# Altium PCB DAC_PCB.PcbDoc (part 1 of 2)
Units mil, origin at the board's own origin, x right, y up, seen from the top; angles counter-clockwise.
Board outline 5600 x 4000 mil, 4 copper layers (Top Layer, Plane(Gnd), Plane(Power), Bottom Layer), stack 23.756 mil thick; 217 components, 206 nets, 575 pads, 152 vias.
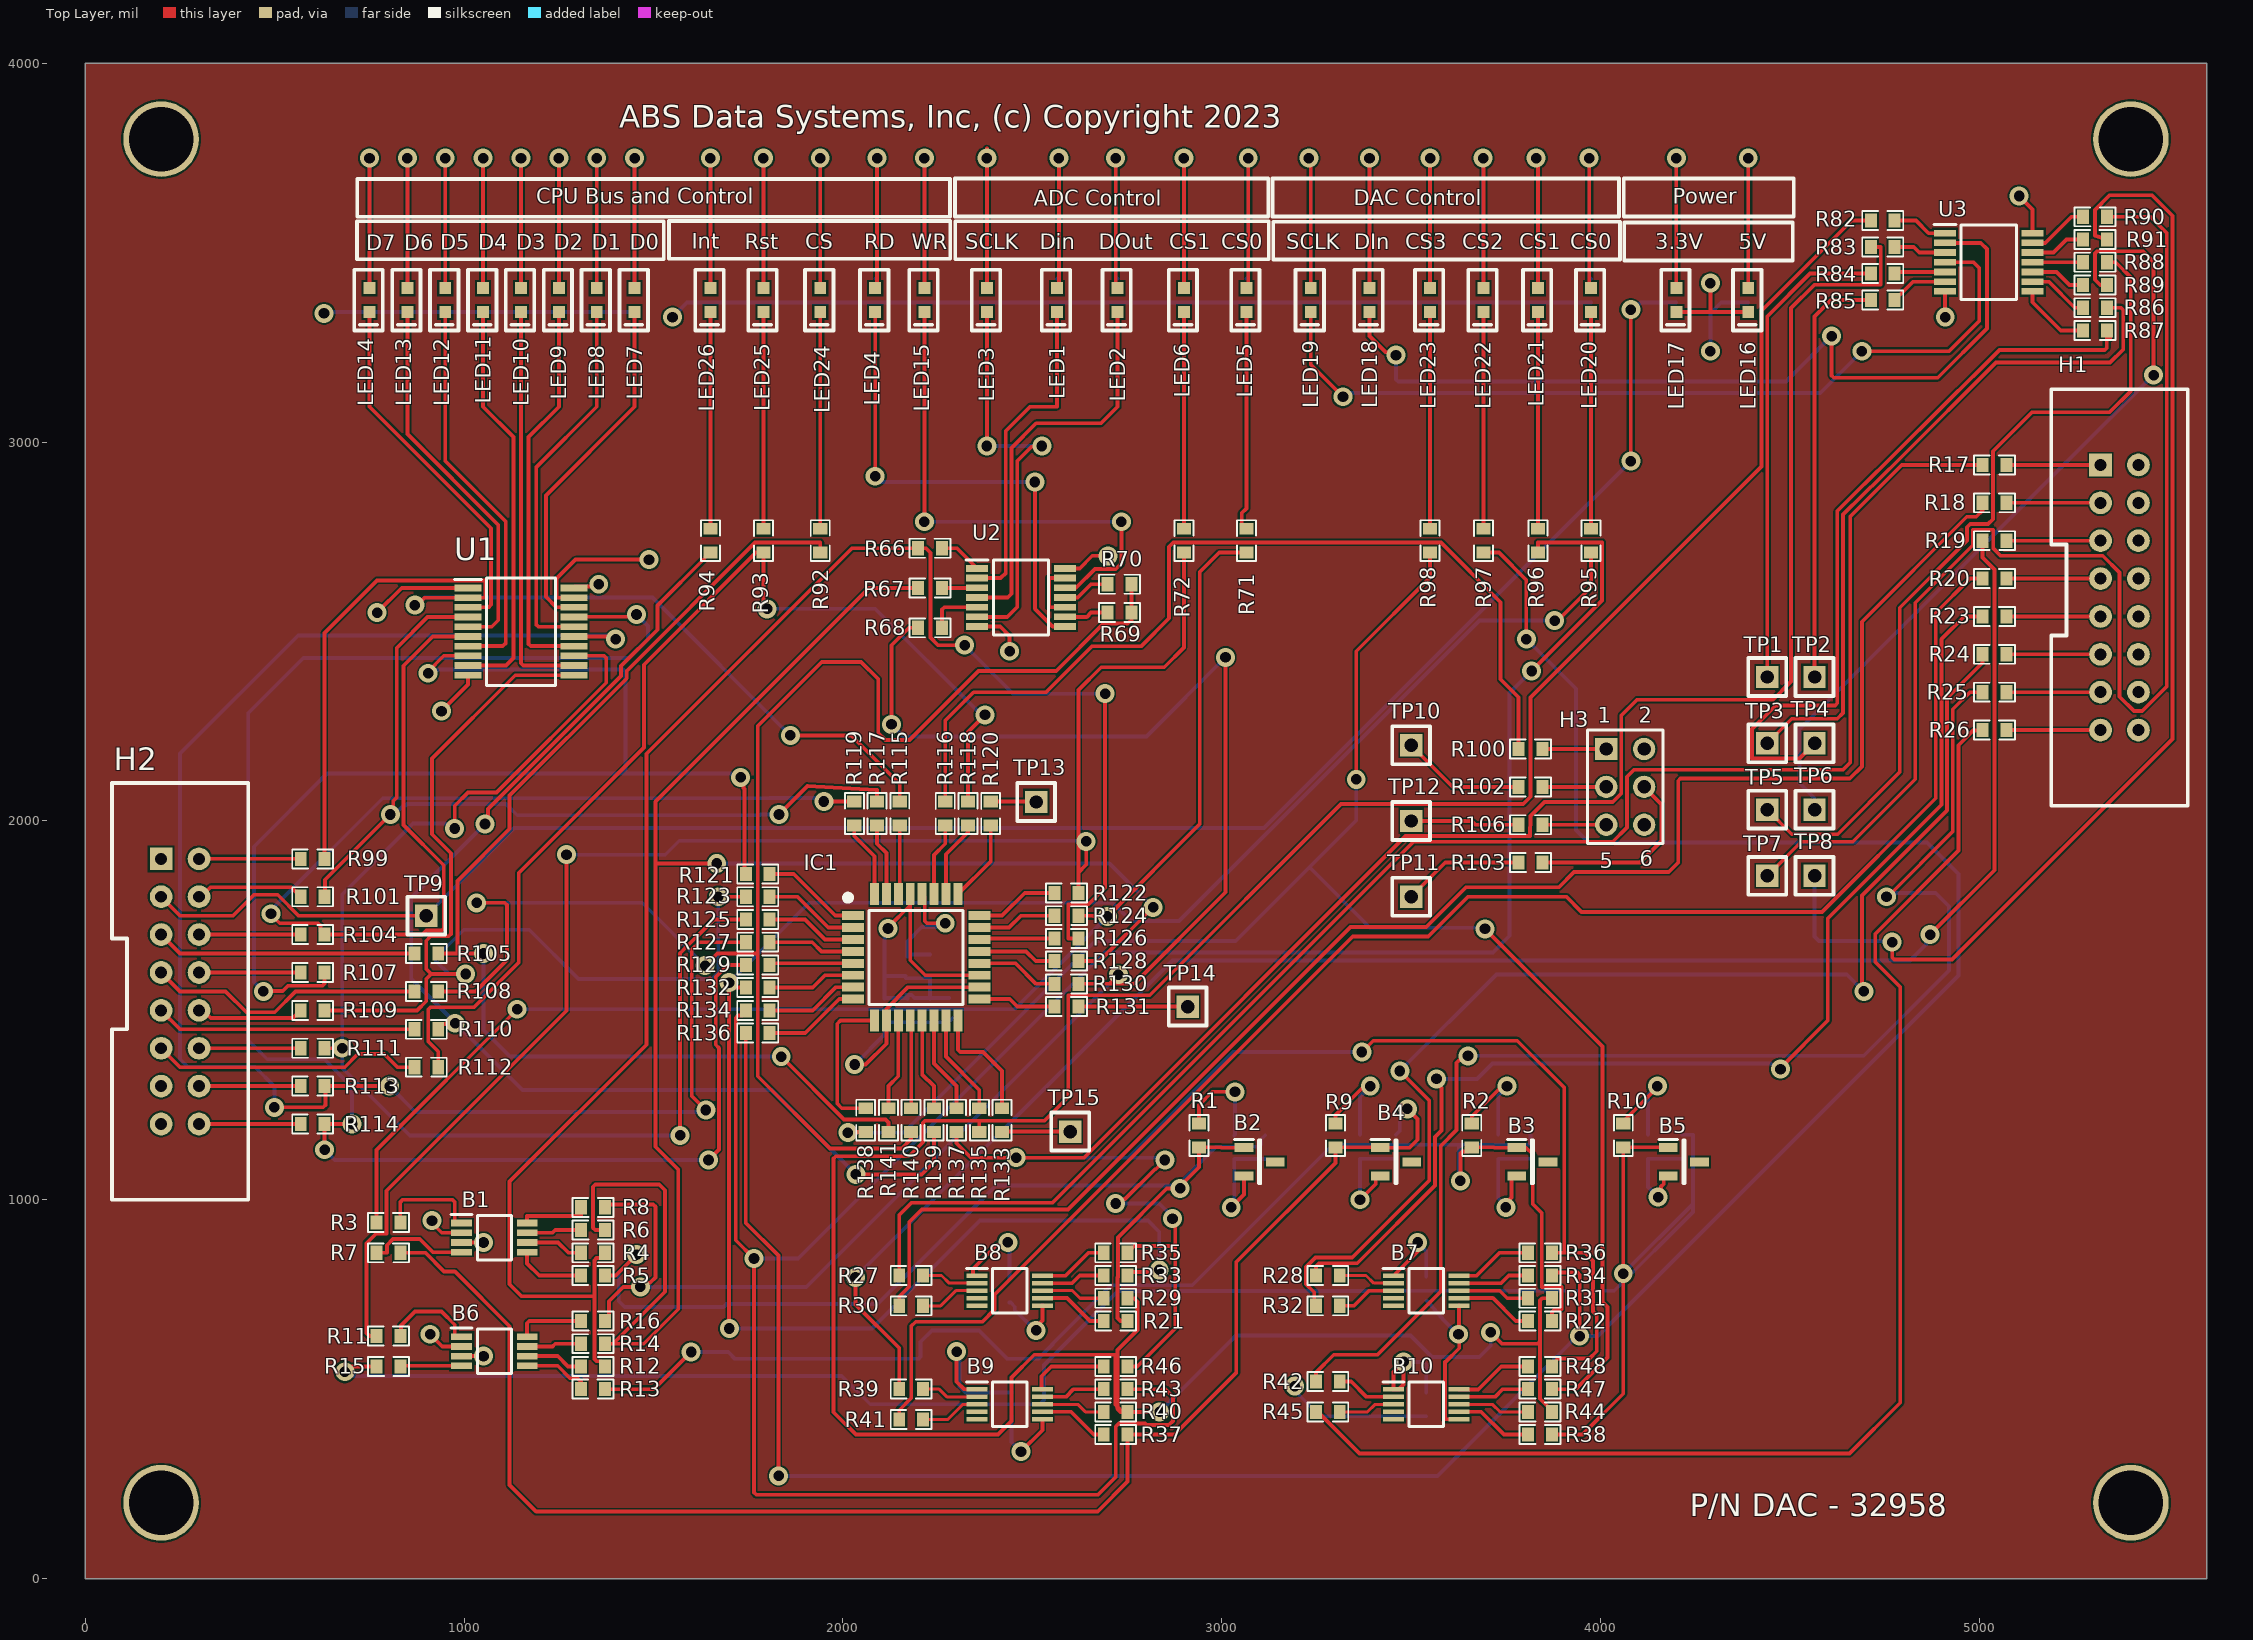
[diagram p0: Top Layer view]
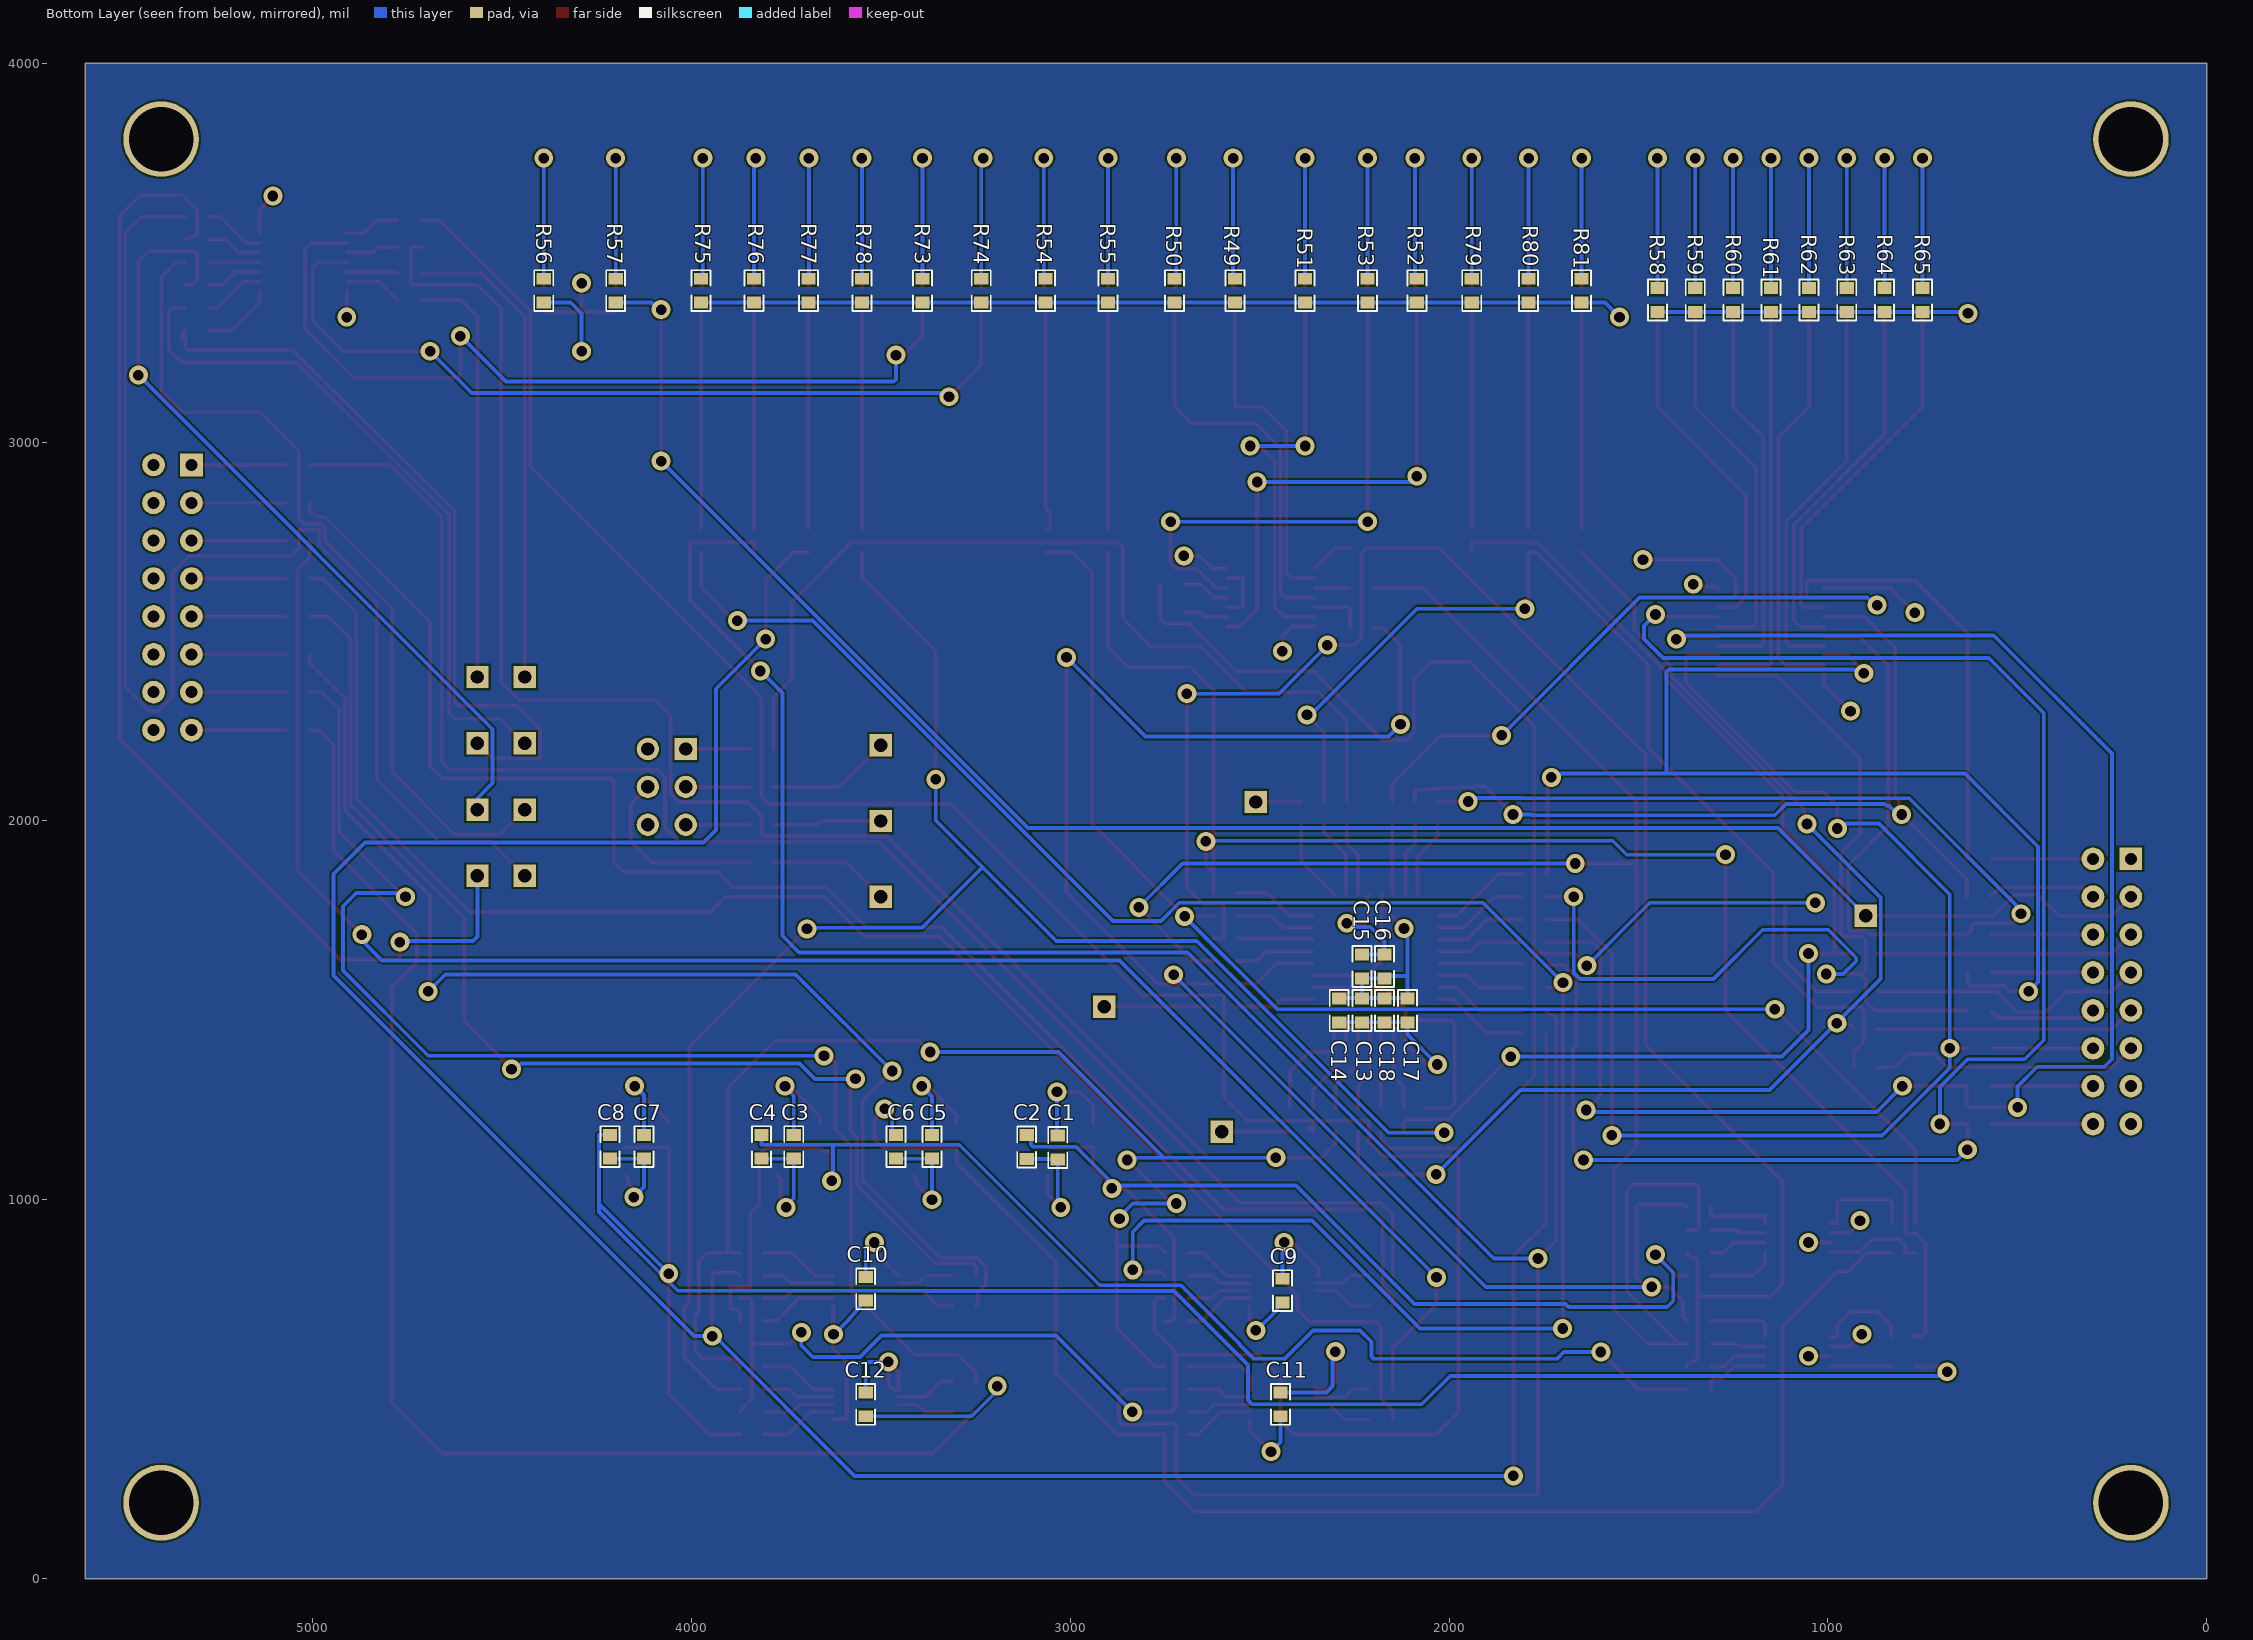
[diagram p1: Bottom Layer view, seen from below]
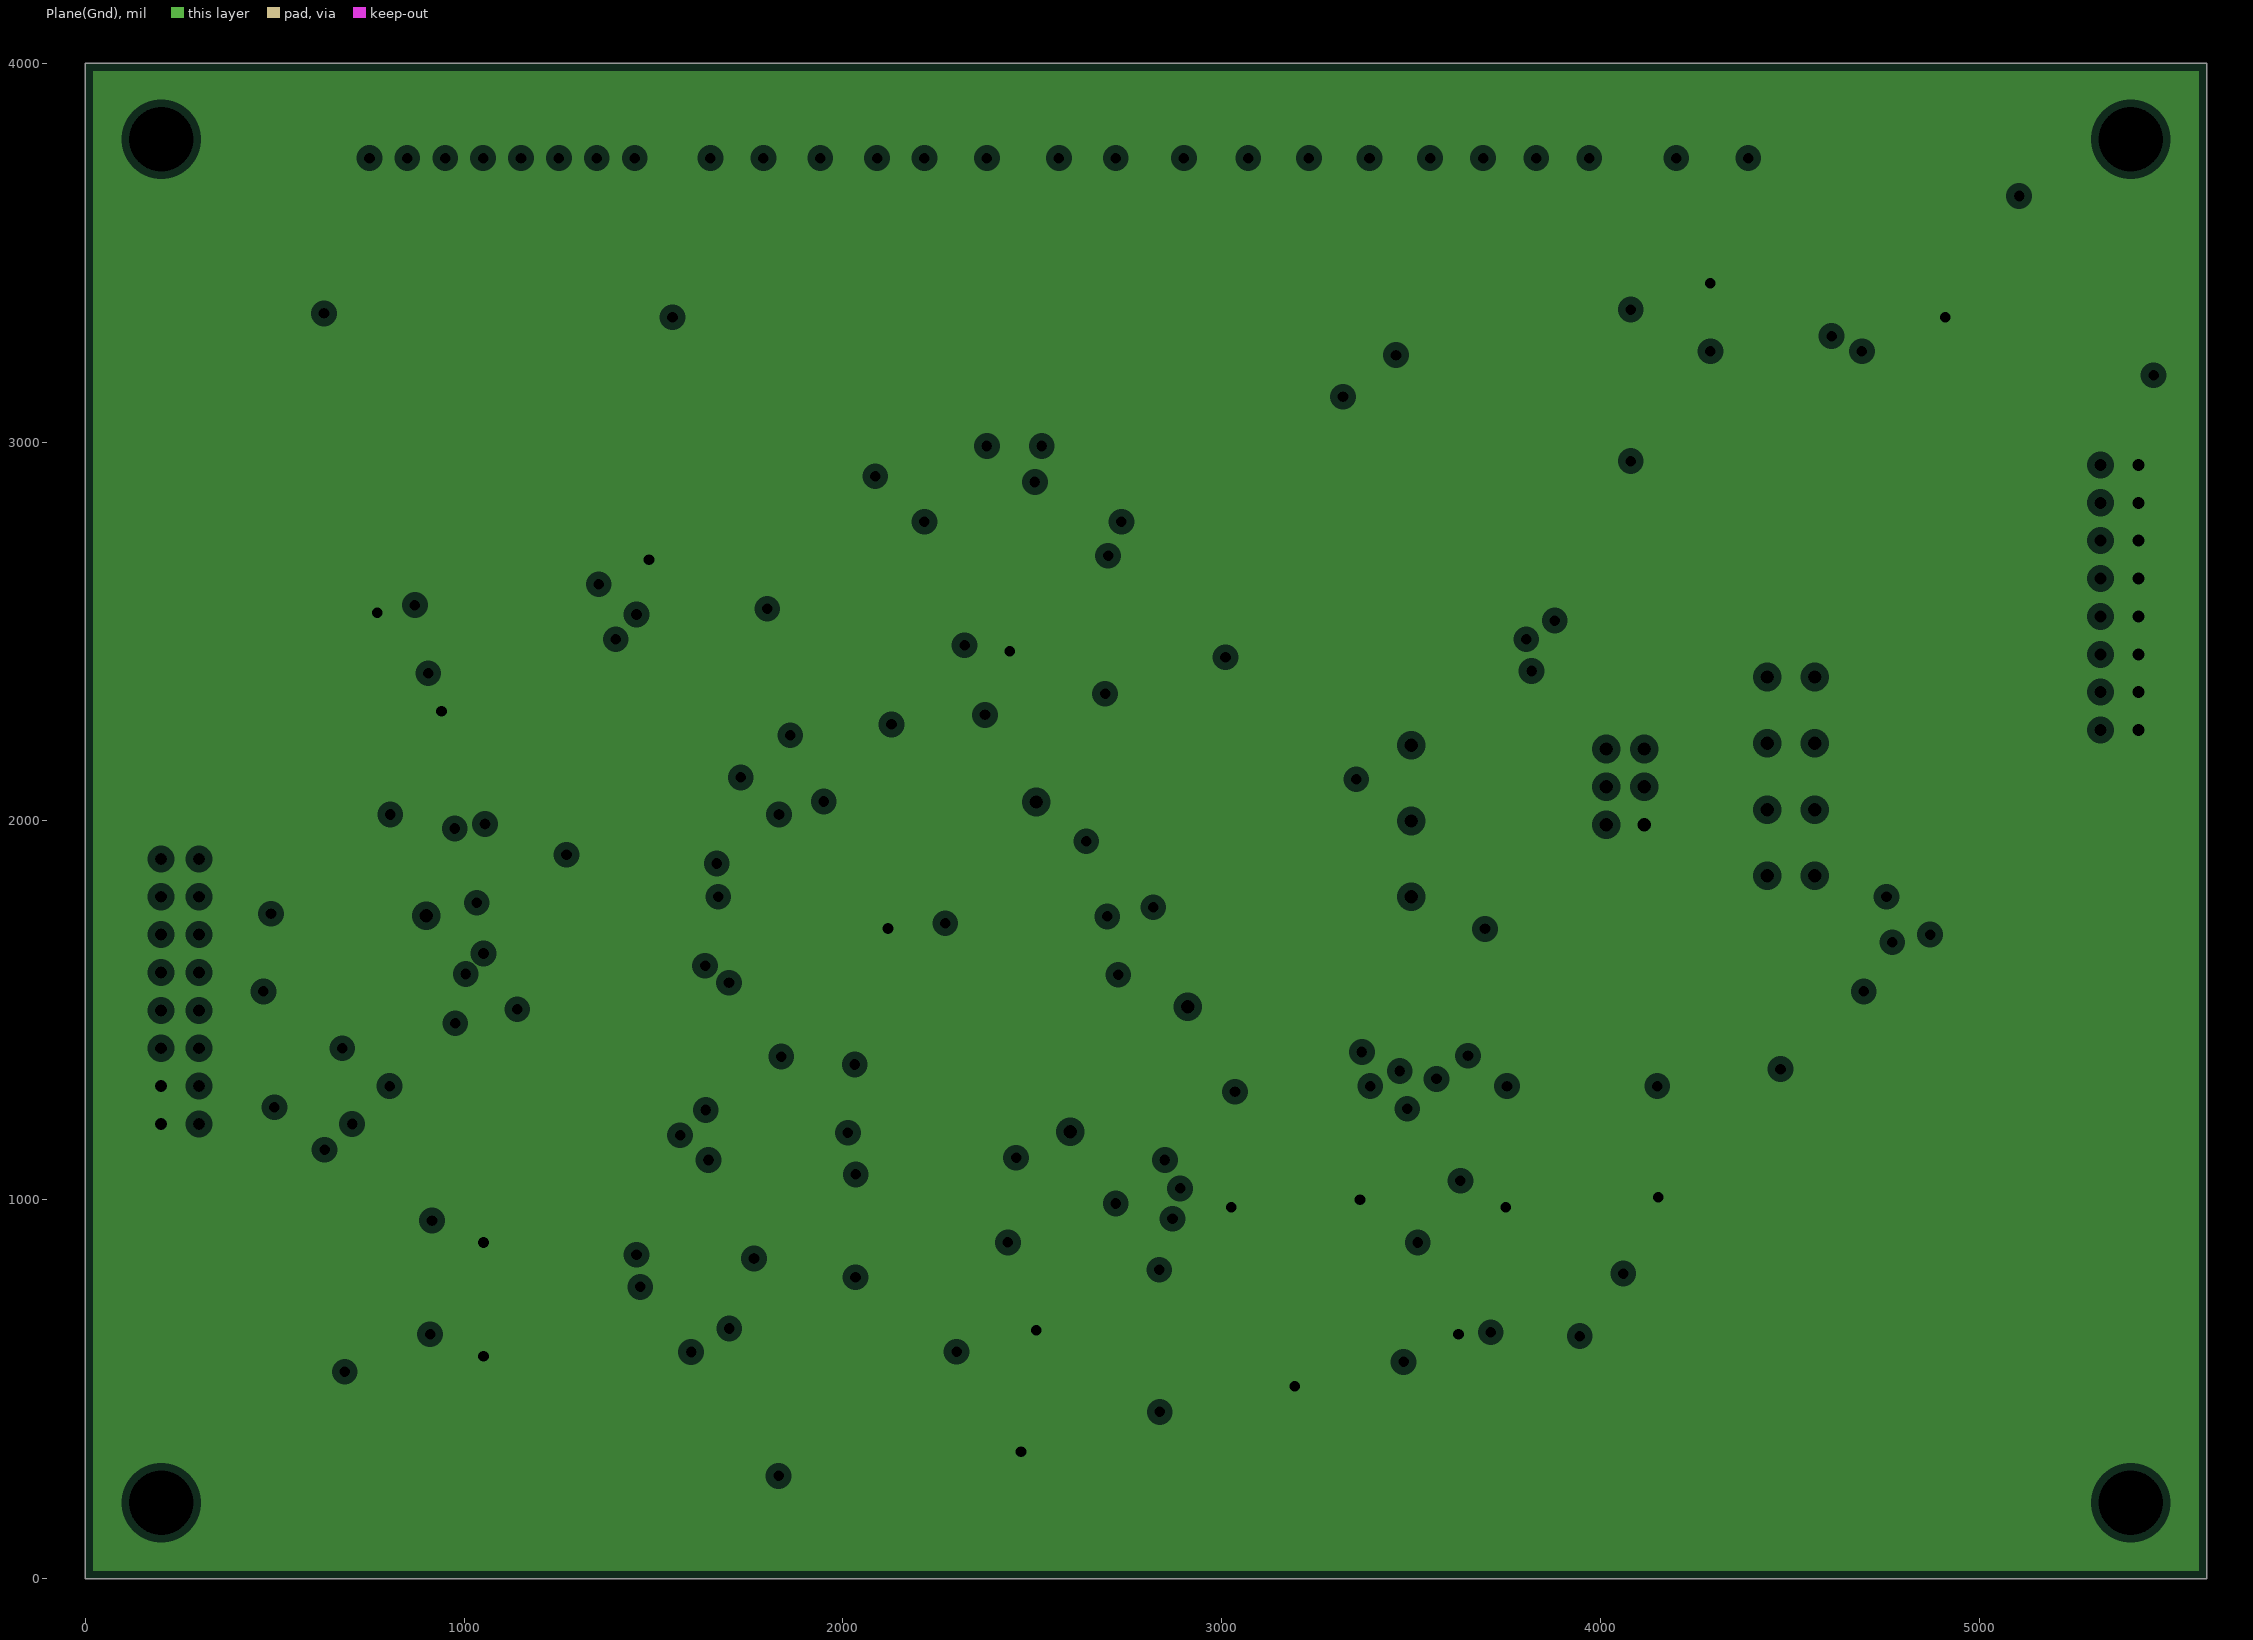
[diagram p2: Plane(Gnd), clearances drawn from the general rule]
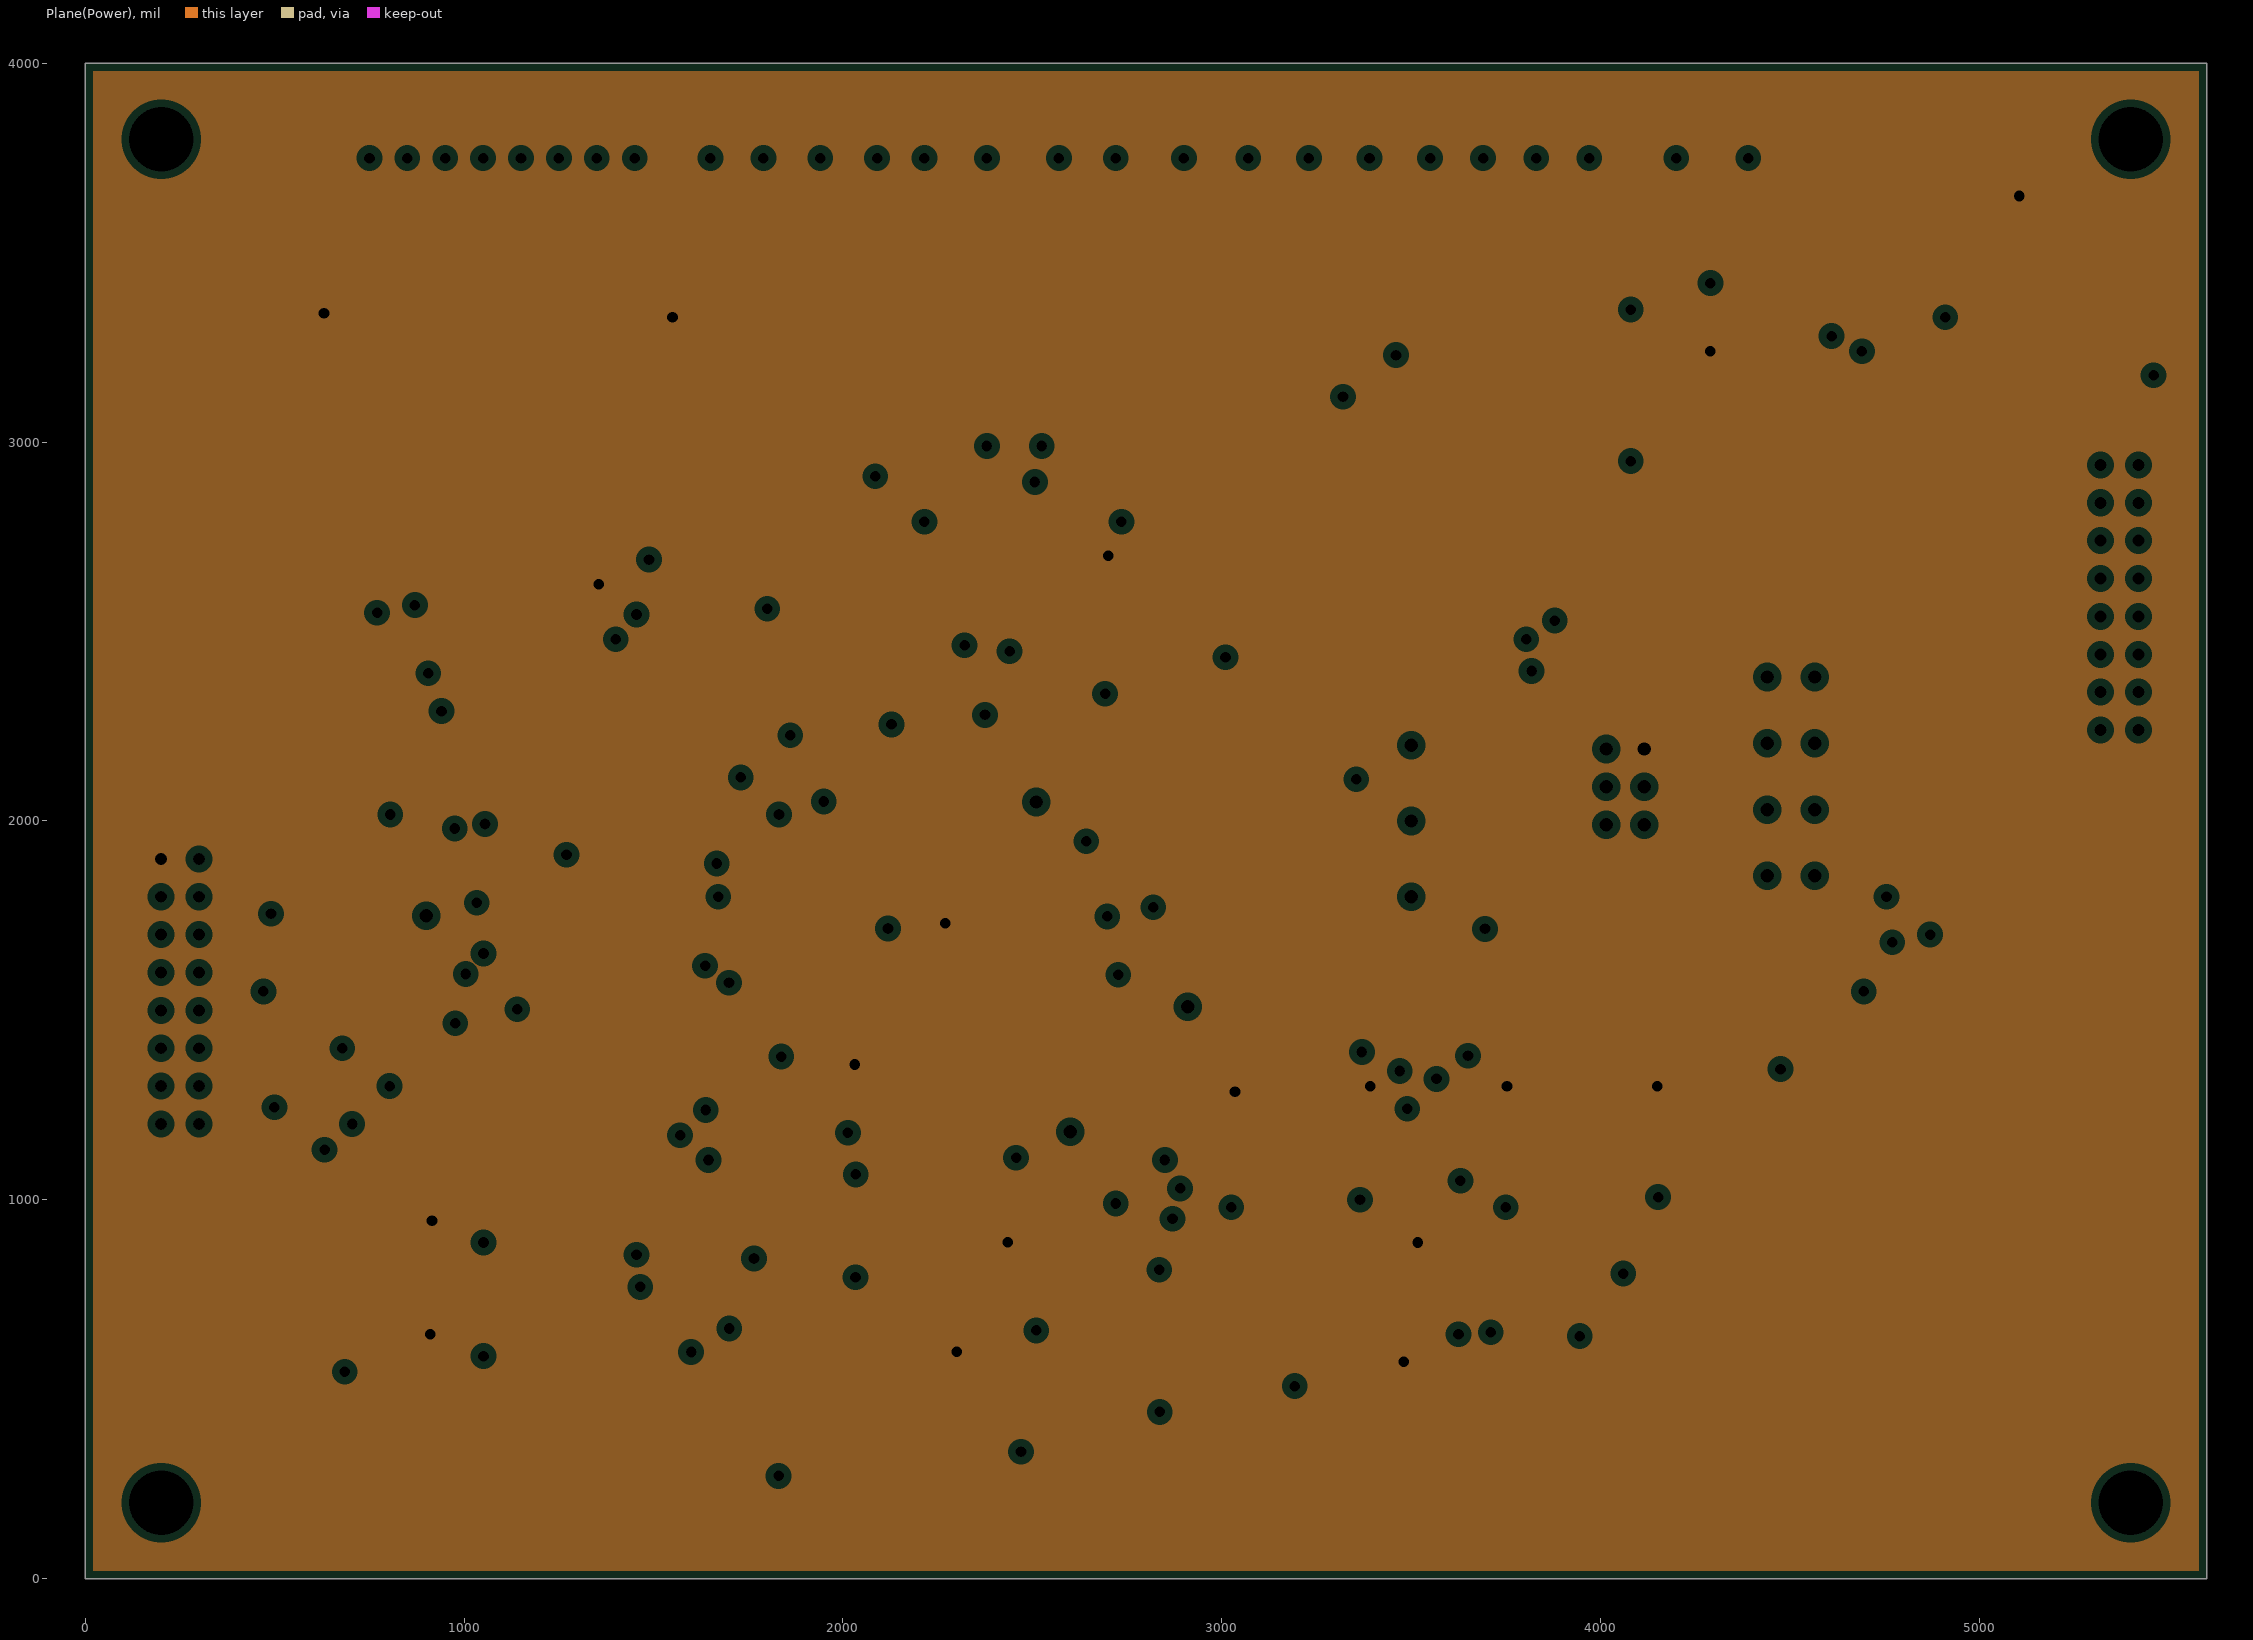
[diagram p3: Plane(Power), clearances drawn from the general rule]
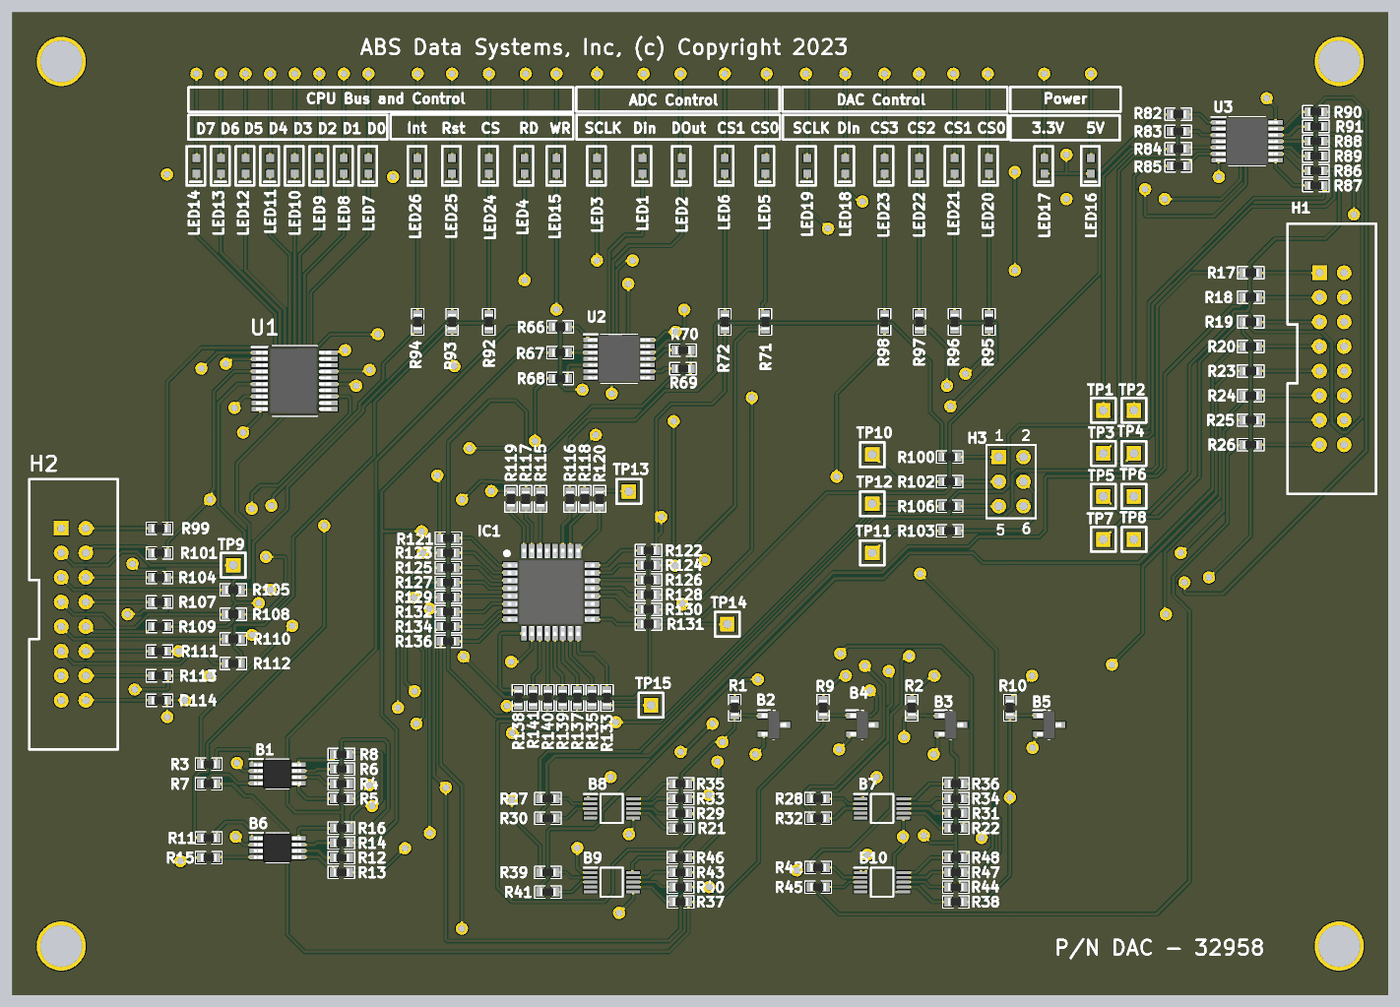
[diagram p5: 3D render of the assembled board from above, using the file's embedded part models]
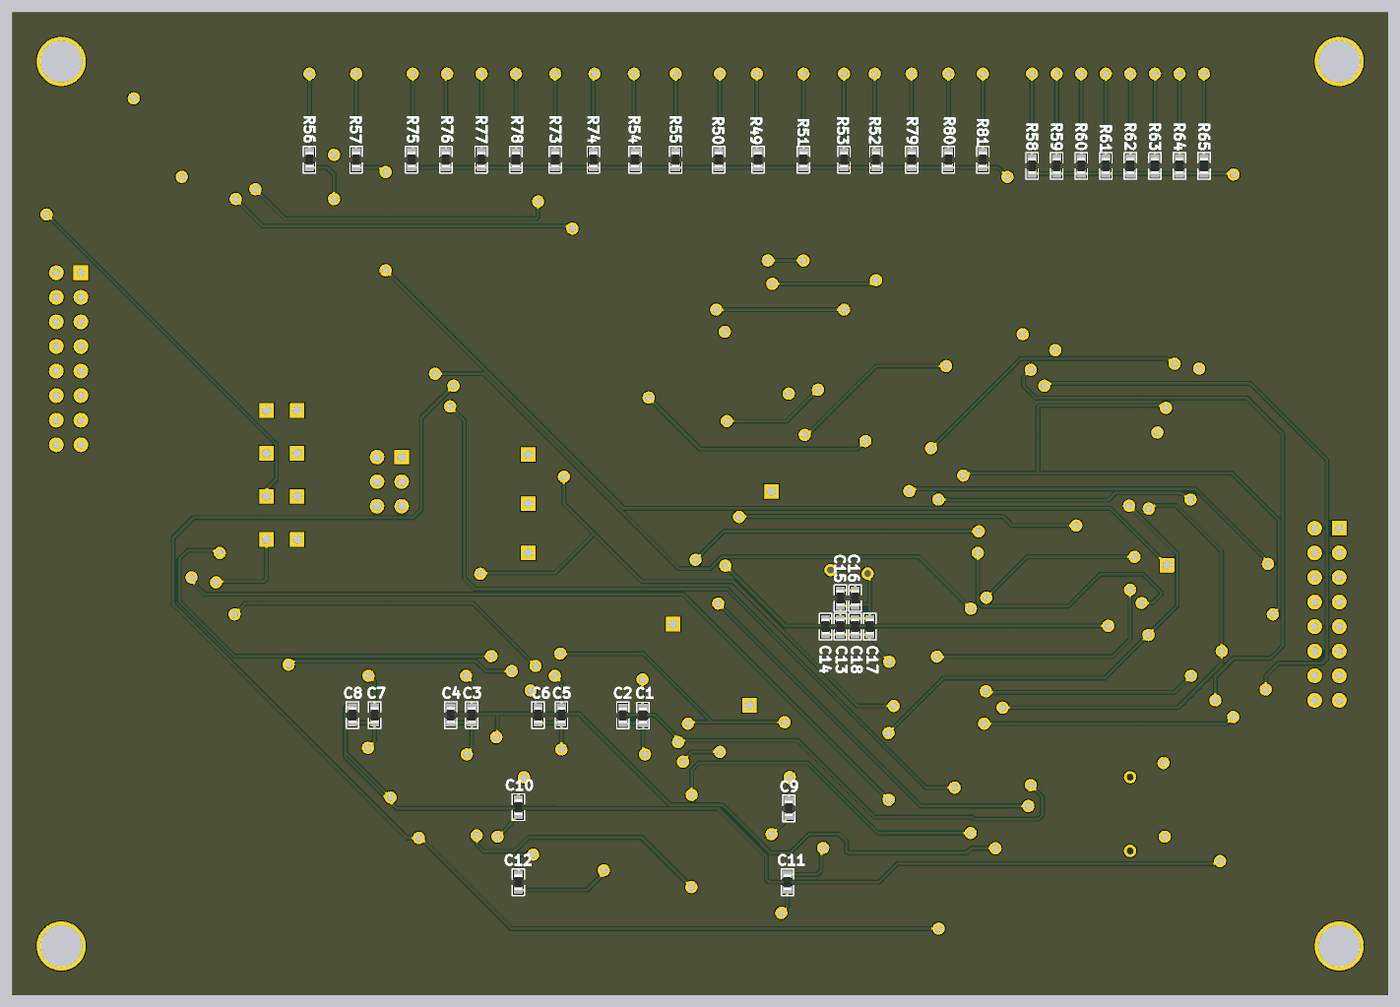
[diagram p6: 3D render of the assembled board from below, using the file's embedded part models]

## Layer stack, top to bottom
Top Solder: solder mask 0.4, Solder Resist, Dk 3.5
Top Layer: signal copper 1.4
Dielectric 2: prepreg 2.8, PP-006, Dk 4.1
Plane(Gnd): plane copper 1.378, net GND
Dielectric 1: dielectric 12.6, FR-4, Dk 4.8
Plane(Power): plane copper 1.378, net +5
Dielectric 3: prepreg 2.8, PP-006, Dk 4.1
Bottom Layer: signal copper 1.4
Bottom Solder: solder mask 0.4, Solder Resist, Dk 3.5

## Board outline
0,0 0,4000 5600,4000 5600,0

## Design rules (kind name [scope] priority, off if disabled: settings)
Clearance [All] p1: gap=5 ignorepadtopadclearanceinfootprint=FALSE
HoleSize [All] p1: absolutevalues=TRUE maxlimit=200 minlimit=1 maxpercent=80.000 minpercent=20.000
HoleToHoleClearance [All] p1: gap=5 allowstackedmicrovias=TRUE
MinimumSolderMaskSliver [All] p1: minsoldermaskwidth=5
PlaneClearance [All] p1: clearance=20
PlaneConnect [All] p1: planeconnectstyle=Relief reliefexpansion=20 reliefentries=4 reliefconductorwidth=10 reliefairgap=10
PolygonConnect [All] p1: connectstyle=Relief reliefconductorwidth=10 reliefentries=4 polygonreliefangle="90 Angle" airgapwidth=10
RoutingVias [All] p1: holewidth=28 width=50 viastyle="Through Hole" minholewidth=28 minwidth=50 maxholewidth=28 maxwidth=50
SilkToSilkClearance [All] p1: silktosilkclearance=4
SilkToSolderMaskClearance [IsPad] p1: minsilkscreentomaskgap=3.5 clearancetoexposedcopper=TRUE
SolderMaskExpansion [All] p1: expansion=4 istentingtop=FALSE
Width [All] p1: maxlimit=10 minlimit=5 preferedwidth=10 minimp=50.000000 maximp=50.000000 favimp=50.000000
23 further rules are at their usual default settings.

## Classes and differential pairs
component class DAC_LED_Monitor: LED1 LED2 LED3 LED4 LED5 LED6 LED7 LED8 LED9 LED10 LED11 LED12 LED13 LED14 LED15 LED16 LED17 LED18 LED19 LED20 LED21 LED22 LED23 LED24 LED25 LED26 R51 R52 R53 R56 R57 R58 R59 R60 R61 R62 R63 R64 R65 R66 R67 R68 R69 R70 R71 R72 R73 R75 R76 R77 R78 R79 R80 R81 R82 R83 R84 R85 R86 R87 R88 R89 R90 R91 R92 R93 R94 R95 R96 R97 R98 TP1 TP2 TP3 TP4 TP5 TP6 TP7 TP8 U1 U2 U3
component class DAC_IO: B1 B2 B3 B4 B5 B6 B7 B8 B9 B10 C1 C2 C3 C4 C5 C6 C7 C8 C9 C10 C11 C12 H1 R1 R2 R3 R4 R5 R6 R7 R8 R9 R10 R11 R12 R13 R14 R15 R16 R17 R18 R19 R20 R21 R22 R23 R24 R25 R26 R27 R28 R29 R30 R31 R32 R33 R34 R35 R36 R37 R38 R39 R40 R41 R42 R43 R44 R45 R46 R47 R48
component class DAC_CPU: C13 C14 C15 C16 C17 C18 H2 H3 IC1 R99 R100 R101 R102 R103 R104 R105 R106 R107 R108 R109 R110 R111 R112 R113 R114 R115 R116 R117 R118 R119 R120 R121 R122 R123 R124 R125 R126 R127 R128 R129 R130 R131 R132 R133 R134 R135 R136 R137 R138 R139 R140 R141 TP9 TP10 TP11 TP12 TP13 TP14 TP15

## Components (designator, comment, footprint, x,y, rotation, side; value= is the part's Value field where it differs from the comment)
B1 "ADC122S021CIMMX_NOPB" SOP65P490X110-8N 1080,900 r0 top locked
B2 "LM4050CIM3X-4.1_NOPB" SOT95P237X95-3N 3100,1100 r0 top locked
B3 "LM4050CIM3X-4.1_NOPB" SOT95P237X95-3N 3820,1100 r0 top locked
B4 "LM4050CIM3X-4.1_NOPB" SOT95P237X95-3N 3460,1100 r0 top locked
B5 "LM4050CIM3X-4.1_NOPB" SOT95P237X95-3N 4220,1100 r0 top locked
B6 "ADC122S021CIMMX_NOPB" SOP65P490X110-8N 1080,600 r0 top locked
B7 "DAC122S085CIMM_NOPB" SOP50P490X110-10N 3540,760 r0 top locked
B8 "DAC122S085CIMM_NOPB" SOP50P490X110-10N 2440,760 r0 top locked
B9 "DAC122S085CIMM_NOPB" SOP50P490X110-10N 2440,460 r0 top locked
B10 "DAC122S085CIMM_NOPB" SOP50P490X110-10N 3540,460 r0 top locked
C1 "100nf" 0603 3033,1138 r90 bottom locked
C2 "2.2uf" 0603 3115,1139 r90 bottom locked
C3 "100nf" 0603 3730,1140 r90 bottom locked
C4 "2.2uf" 0603 3815,1140 r90 bottom locked
C5 "100nf" 0603 3365,1140 r90 bottom locked
C6 "2.2uf" 0603 3460,1140 r90 bottom locked
C7 "100nf" 0603 4125,1140 r90 bottom locked
C8 "2.2uf" 0603 4215,1140 r90 bottom locked
C9 "100nf" 0603 2440,760 r90 bottom locked
C10 "100nf" 0603 3540,765 r90 bottom locked
C11 "100nf" 0603 2445,460 r90 bottom locked
C12 "100nf" 0603 3540,460 r90 bottom locked
C13 "1uf" 0603 2230,1500 r90 bottom locked
C14 "100nf" 0603 2290,1500 r90 bottom locked
C15 "1uf" 0603 2230,1616 r270 bottom locked
C16 "100nf" 0603 2170,1616 r270 bottom locked
C17 "1uf" 0603 2110,1500 r90 bottom locked
C18 "100nf" 0603 2170,1500 r90 bottom locked
H1 "Header_IDC_2x8" HEADER16 5320,2940 r0 top locked
H2 "Header_IDC_2x8" HEADER16 200,1900 r0 top locked
H3 "UDPI Programmer" HDR2X3 4015,2190 r270 top locked
IC1 "AVR64DD32-I_PT" QFP80P900X900X120-32N 2193.32,1640 r0 top locked
LED1 "green" 0603_Diode 2565,3375 r90 top
LED2 "green" 0603_Diode 2725,3375 r90 top
LED3 "green" 0603_Diode 2380,3375 r90 top
LED4 "green" 0603_Diode 2085,3375 r90 top
LED5 "green" 0603_Diode 3065,3375 r90 top
LED6 "green" 0603_Diode 2900,3375 r90 top
LED7 "green" 0603_Diode 1450,3375 r90 top
LED8 "green" 0603_Diode 1350,3375 r90 top
LED9 "green" 0603_Diode 1250,3375 r90 top
LED10 "green" 0603_Diode 1150,3375 r90 top
LED11 "green" 0603_Diode 1050,3375 r90 top
LED12 "green" 0603_Diode 950,3375 r90 top
LED13 "green" 0603_Diode 850,3375 r90 top
LED14 "green" 0603_Diode 750,3375 r90 top
LED15 "red" 0603_Diode 2215,3375 r90 top
LED16 "red" 0603_Diode 4390,3375 r90 top
LED17 "amber" 0603_Diode 4200,3375 r90 top
LED18 "green" 0603_Diode 3390,3375 r90 top
LED19 "green" 0603_Diode 3235,3375 r90 top
LED20 "green" 0603_Diode 3975,3375 r90 top
LED21 "green" 0603_Diode 3835,3375 r90 top
LED22 "green" 0603_Diode 3691,3375 r90 top
LED23 "green" 0603_Diode 3550,3375 r90 top
LED24 "amber" 0603_Diode 1940,3375 r90 top
LED25 "blue" 0603_Diode 1790,3375 r90 top
LED26 "green" 0603_Diode 1650,3375 r90 top
R1 "910" 0603 2940,1170 r270 top
R2 "910" 0603 3660,1170 r270 top locked
R3 "0R" 0603 800,940 r0 top locked
R4 "0R" 0603 1340,860 r180 top locked
R5 "0R" 0603 1340,800 r0 top locked
R6 "0R" 0603 1340,920 r180 top locked
R7 "0R" 0603 800,860 r0 top locked
R8 "0R" 0603 1340,980 r180 top locked
R9 "910" 0603 3300,1170 r270 top locked
R10 "910" 0603 4060,1170 r270 top locked
R11 "0R" 0603 800,640 r0 top locked
R12 "0R" 0603 1340,560 r180 top locked
R13 "0R" 0603 1340,500 r0 top locked
R14 "0R" 0603 1340,620 r180 top locked
R15 "0R" 0603 800,560 r180 top locked
R16 "0R" 0603 1340,680 r180 top locked
R17 "0R" 0603 5040,2940 r0 top locked
R18 "0R" 0603 5040,2840 r0 top locked
R19 "0R" 0603 5040,2740 r0 top locked
R20 "0R" 0603 5040,2640 r0 top locked
R21 "0R" 0603 2720,680 r180 top locked
R22 "0R" 0603 3840,680 r180 top locked
R23 "0R" 0603 5040,2540 r0 top locked
R24 "0R" 0603 5040,2440 r0 top locked
R25 "0R" 0603 5040,2340 r0 top locked
R26 "0R" 0603 5040,2240 r0 top locked
R27 "0R" 0603 2180,800 r180 top locked
R28 "0R" 0603 3280,800 r180 top locked
R29 "0R" 0603 2720,740 r180 top locked
R30 "0R" 0603 2180,720 r180 top locked
R31 "0R" 0603 3840,740 r180 top locked
R32 "0R" 0603 3280,720 r180 top locked
R33 "0R" 0603 2720,800 r180 top locked
R34 "0R" 0603 3840,800 r180 top locked
R35 "0R" 0603 2720,860 r180 top locked
R36 "0R" 0603 3840,860 r180 top locked
R37 "0R" 0603 2720,380 r180 top locked
R38 "0R" 0603 3840,380 r180 top locked
R39 "0R" 0603 2180,500 r180 top locked
R40 "0R" 0603 2720,440 r180 top locked
R41 "0R" 0603 2180,420 r180 top locked
R42 "0R" 0603 3280,520 r180 top locked
R43 "0R" 0603 2720,500 r180 top locked
R44 "0R" 0603 3840,440 r180 top locked
R45 "0R" 0603 3280,440 r180 top locked
R46 "0R" 0603 2720,560 r180 top locked
R47 "0R" 0603 3840,500 r180 top locked
R48 "0R" 0603 3840,560 r180 top locked
R49 "180" 0603 2565,3400 r270 bottom
R50 "180" 0603 2725,3400 r270 bottom
R51 "180" 0603 2380,3400 r270 bottom
R52 "180" 0603 2085,3400 r270 bottom
R53 "180" 0603 2215,3400 r270 bottom
R54 "180" 0603 3065,3400 r270 bottom
R55 "180" 0603 2900,3400 r270 bottom
R56 "180" 0603 4390,3400 r270 bottom
R57 "47" 0603 4200,3400 r90 bottom
R58 "180" 0603 1450,3375 r270 bottom
R59 "180" 0603 1350,3375 r270 bottom
R60 "180" 0603 1250,3375 r270 bottom
R61 "180" 0603 1150,3375 r270 bottom
R62 "180" 0603 1050,3375 r270 bottom
R63 "180" 0603 950,3375 r270 bottom
R64 "180" 0603 850,3375 r270 bottom
R65 "180" 0603 750,3375 r270 bottom
R66 "0R" 0603 2230,2720 r0 top
R67 "0R" 0603 2230,2615 r0 top
R68 "0R" 0603 2230,2510 r0 top
R69 "0R" 0603 2730,2550 r180 top locked
R70 "0R" 0603 2730,2625 r180 top locked
R71 "0R" 0603 3065,2740 r90 top locked
R72 "0R" 0603 2900,2740 r90 top locked
R73 "180" 0603 3390,3400 r270 bottom
R74 "180" 0603 3235,3400 r270 bottom
R75 "180" 0603 3975,3400 r270 bottom
R76 "180" 0603 3835,3400 r270 bottom
R77 "180" 0603 3691,3400 r270 bottom
R78 "180" 0603 3550,3400 r270 bottom
R79 "180" 0603 1940,3400 r270 bottom
R80 "100" 0603 1790,3400 r90 bottom
R81 "180" 0603 1650,3400 r270 bottom
R82 "0R" 0603 4745,3585 r0 top locked
R83 "0R" 0603 4745,3515 r0 top locked
R84 "0R" 0603 4745,3445 r0 top locked
R85 "0R" 0603 4745,3375 r180 top locked
R86 "0R" 0603 5305,3355 r180 top locked
R87 "0R" 0603 5305,3295 r0 top locked
R88 "0R" 0603 5305,3475 r180 top locked
R89 "0R" 0603 5305,3415 r0 top locked
R90 "0R" 0603 5305,3595 r180 top locked
R91 "0R" 0603 5305,3535 r0 top locked
R92 "0R" 0603 1940,2740 r90 top locked
R93 "0R" 0603 1790,2740 r90 top locked
R94 "0R" 0603 1650,2740 r90 top locked
R95 "0R" 0603 3975,2740 r90 top locked
R96 "0R" 0603 3835,2740 r90 top locked
R97 "0R" 0603 3691,2740 r90 top locked
R98 "0R" 0603 3550,2740 r90 top locked
R99 "0R" 0603 600,1900 r180 top locked
R100 "0R" 0603 3815,2190 r0 top
R101 "0R" 0603 600,1800 r180 top locked
R102 "0R" 0603 3815,2090 r0 top
R103 "0R" 0603 3815,1890 r180 top
R104 "0R" 0603 600,1700 r180 top locked
R105 "0R" 0603 900,1650 r0 top locked
R106 "0R" 0603 3815,1990 r0 top
R107 "0R" 0603 600,1600 r180 top locked
R108 "0R" 0603 900,1550 r0 top locked
R109 "0R" 0603 600,1500 r180 top locked
R110 "0R" 0603 900,1450 r0 top locked
R111 "0R" 0603 600,1400 r180 top locked
R112 "0R" 0603 900,1350 r0 top locked
R113 "0R" 0603 600,1300 r180 top locked
R114 "0R" 0603 600,1200 r180 top locked
R115 "0R" 0603 2150,2020 r270 top locked
R116 "0R" 0603 2270,2020 r90 top locked
R117 "0R" 0603 2090,2020 r270 top locked
R118 "0R" 0603 2330,2020 r90 top locked
R119 "0R" 0603 2030,2020 r270 top locked
R120 "0R" 0603 2390,2020 r90 top locked
R121 "0R" 0603 1775,1860 r0 top locked
R122 "0R" 0603 2590,1810 r0 top locked
R123 "0R" 0603 1775,1800 r0 top locked
R124 "0R" 0603 2590,1750 r0 top locked
R125 "0R" 0603 1775,1740 r0 top locked
R126 "0R" 0603 2590,1690 r0 top locked
R127 "0R" 0603 1775,1680 r0 top locked
R128 "0R" 0603 2590,1630 r0 top locked
R129 "0R" 0603 1775,1620 r0 top locked
R130 "0R" 0603 2590,1570 r0 top locked
R131 "0R" 0603 2590,1510 r0 top locked
R132 "0R" 0603 1775,1560 r0 top locked
R133 "0R" 0603 2420,1210 r270 top locked
R134 "0R" 0603 1775,1500 r0 top locked
R135 "0R" 0603 2360,1210 r270 top locked
R136 "0R" 0603 1775,1440 r0 top locked
R137 "0R" 0603 2300,1210 r270 top locked
R138 "0R" 0603 2060,1210 r90 top locked
R139 "0R" 0603 2240,1210 r270 top locked
R140 "0R" 0603 2180,1210 r270 top locked
R141 "0R" 0603 2120,1210 r270 top locked
TP1 "TP" TP 4440,2380 r0 top locked
TP2 "TP" TP 4565,2380 r0 top locked
TP3 "TP" TP 4440,2205 r0 top locked
TP4 "TP" TP 4565,2205 r0 top locked
TP5 "TP" TP 4440,2030 r0 top locked
TP6 "TP" TP 4565,2030 r0 top locked
TP7 "TP" TP 4440,1855 r0 top locked
TP8 "TP" TP 4565,1855 r0 top locked
TP9 "TP" TP 900,1750 r0 top locked
TP10 "TP" TP 3500,2200 r0 top locked
TP11 "TP" TP 3500,1800 r0 top locked
TP12 "TP" TP 3500,2000 r0 top locked
TP13 "TP" TP 2510,2050 r0 top locked
TP14 "TP" TP 2910,1510 r0 top locked
TP15 "TP" TP 2600,1180 r0 top locked
U1 "SN74ABT240ADBR" SOP65P780X200-20N 1150,2500 r0 top locked
U2 "SN74AC04PWR" SOP65P640X120-14N 2470,2590 r0 top locked
U3 "SN74AC04PWR" SOP65P640X120-14N 5025,3475 r0 top locked

## Footprints (in the part's own frame and the unit in brackets; to place one, negate y for a bottom-side part, rotate by r counter-clockwise, add the part's x,y. Pads: shape width x height; smd on the part's side, far side on the other; paste and mask are expansions set on the pad)
0603 [mm]
  rect 0.8x0.95 smd: 1(-0.8,0) 2(0.8,0)
  silkscreen extent -1.37,-0.64 1.37,0.64, body extent -0.8,-0.4 0.8,0.4, height 0.55
0603_Diode [mm]
  rect 0.8x0.8 smd: 1(-0.8,0) 2(0.8,0)
  silkscreen extent -2.03,-0.89 2.03,1.02
HDR2X3 [mm] "Connector; Header; 3x2 Position"
  rect 1.5x1.5 hole 0.9: 1(0,0)
  round 1.5 hole 0.9: 2(0,2.54) 3(2.54,0) 4(2.54,2.54) 5(5.08,0) 6(5.08,2.54)
  silkscreen extent -1.27,-1.27 6.35,3.81
HEADER16 [mil]
  rect 60x60 hole 31.5: 1(0,0)
  round 60 hole 31.5: 2(100,0) 3(0,-100) 4(100,-100) 5(0,-200) 6(100,-200) 7(0,-300) 8(100,-300) 9(0,-400) 10(100,-400) 11(0,-500) 12(100,-500) 13(0,-600) 14(100,-600) 15(0,-700) 16(100,-700)
  silkscreen extent -130,-900 230,200
QFP80P900X900X120-32N [mm]
  rect 1.475x0.6 smd: 1(-4.238,2.8) 2(-4.238,2) 3(-4.238,1.2) 4(-4.238,0.4) 5(-4.238,-0.4) 6(-4.238,-1.2) 7(-4.238,-2) 8(-4.238,-2.8) 17(4.238,-2.8) 18(4.238,-2) 19(4.238,-1.2) 20(4.238,-0.4) 21(4.238,0.4) 22(4.238,1.2) 23(4.238,2) 24(4.238,2.8)
  rect 0.6x1.475 smd: 9(-2.8,-4.238) 10(-2,-4.238) 11(-1.2,-4.238) 12(-0.4,-4.238) 13(0.4,-4.238) 14(1.2,-4.238) 15(2,-4.238) 16(2.8,-4.238) 25(2.8,4.238) 26(2,4.238) 27(1.2,4.238) 28(0.4,4.238) 29(-0.4,4.238) 30(-1.2,4.238) 31(-2,4.238) 32(-2.8,4.238)
  silkscreen extent -4.77,-3.15 3.15,4.2, body extent -4.5,-4.5 4.5,4.5, height 1.2
SOP50P490X110-10N [mm]
  rect 1.4x0.3 smd: 1(-2.2,1) 2(-2.2,0.5) 3(-2.2,0) 4(-2.2,-0.5) 5(-2.2,-1) 6(2.2,-1) 7(2.2,-0.5) 8(2.2,0) 9(2.2,0.5) 10(2.2,1)
  silkscreen extent -2.9,-1.5 1.15,1.5, body extent -2.21,-1.5 2.72,1.5, height 1.1
SOP65P490X110-8N [mm]
  rect 1.4x0.45 smd: 1(-2.2,0.975) 2(-2.2,0.325) 3(-2.2,-0.325) 4(-2.2,-0.975) 5(2.2,-0.975) 6(2.2,-0.325) 7(2.2,0.325) 8(2.2,0.975)
  silkscreen extent -2.9,-1.5 1.15,1.55, body extent -2.45,-1.5 2.45,1.5, height 1.1
SOP65P640X120-14N [mm]
  rect 1.475x0.45 smd: 1(-2.938,1.95) 2(-2.938,1.3) 3(-2.938,0.65) 4(-2.938,0) 5(-2.938,-0.65) 6(-2.938,-1.3) 7(-2.938,-1.95) 8(2.938,-1.95) 9(2.938,-1.3) 10(2.938,-0.65) 11(2.938,0) 12(2.938,0.65) 13(2.938,1.3) 14(2.938,1.95)
  silkscreen extent -3.67,-2.5 1.85,2.53, body extent -3.2,-2.5 3.2,2.5, height 1.13
SOP65P780X200-20N [mm]
  rect 1.8x0.45 smd: 1(-3.55,2.925) 2(-3.55,2.275) 3(-3.55,1.625) 4(-3.55,0.975) 5(-3.55,0.325) 6(-3.55,-0.325) 7(-3.55,-0.975) 8(-3.55,-1.625) 9(-3.55,-2.275) 10(-3.55,-2.925) 11(3.55,-2.925) 12(3.55,-2.275) 13(3.55,-1.625) 14(3.55,-0.975) 15(3.55,-0.325) 16(3.55,0.325) 17(3.55,0.975) 18(3.55,1.625) 19(3.55,2.275) 20(3.55,2.925)
  silkscreen extent -4.45,-3.6 2.3,3.6, body extent -4.03,-3.6 3.77,3.6, height 1.9
SOT95P237X95-3N [mm]
  rect 1.25x0.6 smd: 1(-1.05,0.95) 2(-1.05,-0.95) 3(1.05,0)
  silkscreen extent -1.67,-1.46 0.07,1.5, body extent -1.27,-1.46 1.27,1.46, height 1
TP [mm] "Test Point"
  rect 1.5x1.5 hole 0.9: 1(0,0)
  silkscreen extent -1.27,-1.27 1.27,1.27

## Part data
B1 B6: "2 Channel, 50 ksps to 200 ksps 12-Bit A/D Converter", Manufacturer_Name="Texas Instruments", Manufacturer_Part_Number=ADC122S021CIMMX/NOPB, Mouser Part Number=926-A122S021CIMMXNPB, Datasheet Link=http://www.ti.com/lit/gpn/ADC122S021, Geometry.Height=1.1mm, Mouser Price/Stock=https://www.mouser.co.uk/ProductDetail/Texas-Instruments/ADC122S021CIMMX-NOPB/?qs=7X5t%252BdzoRHB2bC7Teu8H3A%3D%3D
B2 B3 B4 B5: "50ppm/C Precision Micropower Shunt Voltage Reference", Manufacturer_Name="Texas Instruments", Manufacturer_Part_Number=LM4050CIM3X-4.1/NOPB, Mouser Part Number=926-LM4050CIM3X41NPB, Datasheet Link=http://www.ti.com/lit/gpn/lm4050-n, Geometry.Height=0.95mm, Mouser Price/Stock=https://www.mouser.co.uk/ProductDetail/Texas-Instruments/LM4050CIM3X-4.1-NOPB?qs=QbsRYf82W3Em%2F29oRlpByg%3D%3D
B7 B8 B9 B10: "12-Bit Micro Power DUAL Digital-to-Analog Converter with Rail-to-Rail Output", Manufacturer_Name="Texas Instruments", Manufacturer_Part_Number=DAC122S085CIMM/NOPB, Mouser Part Number=926-DAC122S085CIMMNO, Datasheet Link=http://www.ti.com/lit/gpn/dac122s085, Geometry.Height=1.1mm, Mouser Price/Stock=https://www.mouser.co.uk/ProductDetail/Texas-Instruments/DAC122S085CIMM-NOPB/?qs=7X5t%252BdzoRHCSswOz%252BE6yGA%3D%3D
C1 C3 C5 C7 C9 C10 C11 C12 C14 C16 C18: library part CL10B104JB8NNNC, "Samsung Electro-Mechanics 0603 100nf"
C2 C4 C6 C8: library part CL10B225KP8NNNC, "Samsung Electro-Mechanics 0603 2.2uf"
C13 C15 C17: library part CL10B105KA8NNNL, "Samsung Electro-Mechanics 0603 1uf"
H1 H2: "16 Pin 2x8 Through Hold IDC Connector", Color=Black, Manufacturer=Samtec, Manufacturer Part Number=TST-108-01-G-D, Max Operating Temperature=125°C, Min Operating Temperature=-55°C, Supplier Part Number 1=SAM10835-ND, Category="Headers and Wire Housings", ComponentLink1Description=https://datasheet.ciiva.com/739/tst-mkt-739845.pdf?src-supplier=Digi-Key, ComponentLink1URL=https://datasheet.ciiva.com/739/tst-mkt-739845.pdf?src-supplier=Digi-Key, ComponentLink2Description=https://datasheet.ciiva.com/10018/htst-10018510.pdf?src-supplier=Avnet, ComponentLink2URL=https://datasheet.ciiva.com/10018/htst-10018510.pdf?src-supplier=Avnet, Connector Type="Male Pin", Contact Material=Bronze, Contact Mating Length=0.25inch, Contact Plating=Gold, Depth=9.27mm, Gender=Male, Housing Color=Black, Housing Material=Polyester, Length=27.94mm, Mount="Through Hole", Number of Contacts=16, Number of Positions=16, Number of Rows=2, Orientation=Straight, Packaging=Rail/Tube, Pitch=2.54mm, Pricing 1="1=2.85000, 10=2.73600, 100=2.28000, 500=1.93800, 1000=1.65300, 5000=1.48200 (USD)", REACH SVHC="No SVHC", RoHS=Yes, Row Spacing=0.1inch, Stock 1=227, Supplier 1=Digi-Key, Termination=Solder
H3: "6 Pin 2X3 Through Hole Header"
IC1: "Integrated Circuit", Manufacturer_Name=Microchip, Manufacturer_Part_Number="AVR64DD32-I/PT | MULTI-VOLTAGE I/O", Datasheet Link=https://www.microchip.com/en-us/product/AVR64DD32, Height=1.2mm
LED1 LED2 LED3 LED4 LED5 LED6 LED7 LED8 LED9 LED10 LED11 LED12 LED13 LED14 LED18 LED19 LED20 LED21 LED22 LED23 LED26: library part 150060GS75000, "Wurth Elektronik 0603 green", Case Code (Imperial)=0603, Case Code (Metric)=1608, Color=Green, Forward Current=30mA, Forward Voltage=3.2V, Manufacturer="Wurth Electronics", Max Operating Temperature=85°C, Min Operating Temperature=-40°C, Package Quantity=4000, Test Current=20mA, Case/Package=0603, Category=LEDs, ComponentLink1Description=https://datasheet.ciiva.com/29562/150060gs75000-29562868.pdf?src-supplier=Digi-Key, ComponentLink1URL=https://datasheet.ciiva.com/29562/150060gs75000-29562868.pdf?src-supplier=Digi-Key, ComponentLink2Description=https://datasheet.ciiva.com/29279/759427-da-01-en-chipled-0603-w-kl-gruen-150060gs75000-29279201.pdf?src-supplier=Conrad, ComponentLink2URL=https://datasheet.ciiva.com/29279/759427-da-01-en-chipled-0603-w-kl-gruen-150060gs75000-29279201.pdf?src-supplier=Conrad, ComponentLink3Description=https://datasheet.ciiva.com/29562/150060gs75000-29562869.pdf?src-supplier=Digi-Key, ComponentLink3URL=https://datasheet.ciiva.com/29562/150060gs75000-29562869.pdf?src-supplier=Digi-Key, ComponentLink4Description=https://datasheet.ciiva.com/29562/150060gs75000-29562870.pdf?src-supplier=Digi-Key, ComponentLink4URL=https://datasheet.ciiva.com/29562/150060gs75000-29562870.pdf?src-supplier=Digi-Key, Dominant Wavelength=520nm, Height=0.7mm, Lead Free="Lead Free", Length=1.6mm, Lens Style=Clear,Rectangular, Luminous Intensity=430mcd, Manufacturer Part Number=150060GS75000, Mount="Surface Mount", Packaging="Tape and Reel", Pricing 1="1=0.14000, 50=0.13300, 100=0.11400, 500=0.09900 (USD)", REACH SVHC=Unknown, RoHS=Yes, Stock 1=71509, Supplier 1=Digi-Key, Viewing Angle=140°, Wavelength=520nm, Width=0.8mm
LED15 LED16: library part 150060RS75000, "Wurth Elektronik 0603 red", Case Code (Imperial)=0603, Case Code (Metric)=1608, Color=Green, Forward Current=30mA, Forward Voltage=3.2V, Manufacturer="Wurth Electronics", Manufacturer Part Number=150060GS75000, Max Operating Temperature=85°C, Min Operating Temperature=-40°C, Package Quantity=4000, Test Current=20mA, Case/Package=0603, Category=LEDs, ComponentLink1Description=https://datasheet.ciiva.com/29562/150060gs75000-29562868.pdf?src-supplier=Digi-Key, ComponentLink1URL=https://datasheet.ciiva.com/29562/150060gs75000-29562868.pdf?src-supplier=Digi-Key, ComponentLink2Description=https://datasheet.ciiva.com/29279/759427-da-01-en-chipled-0603-w-kl-gruen-150060gs75000-29279201.pdf?src-supplier=Conrad, ComponentLink2URL=https://datasheet.ciiva.com/29279/759427-da-01-en-chipled-0603-w-kl-gruen-150060gs75000-29279201.pdf?src-supplier=Conrad, ComponentLink3Description=https://datasheet.ciiva.com/29562/150060gs75000-29562869.pdf?src-supplier=Digi-Key, ComponentLink3URL=https://datasheet.ciiva.com/29562/150060gs75000-29562869.pdf?src-supplier=Digi-Key, ComponentLink4Description=https://datasheet.ciiva.com/29562/150060gs75000-29562870.pdf?src-supplier=Digi-Key, ComponentLink4URL=https://datasheet.ciiva.com/29562/150060gs75000-29562870.pdf?src-supplier=Digi-Key, Dominant Wavelength=520nm, Height=0.7mm, Lead Free="Lead Free", Length=1.6mm, Lens Style=Clear,Rectangular, Luminous Intensity=430mcd, Mount="Surface Mount", Packaging="Tape and Reel", Pricing 1="1=0.14000, 50=0.13300, 100=0.11400, 500=0.09900 (USD)", REACH SVHC=Unknown, RoHS=Yes, Stock 1=71509, Supplier 1=Digi-Key, Viewing Angle=140°, Wavelength=520nm, Width=0.8mm
LED17 LED24: library part 150060AS75000, "Wurth Elektronik 0603 amber", Case Code (Imperial)=0603, Case Code (Metric)=1608, Color=Green, Forward Current=30mA, Forward Voltage=3.2V, Manufacturer="Wurth Electronics", Manufacturer Part Number=150060GS75000, Max Operating Temperature=85°C, Min Operating Temperature=-40°C, Package Quantity=4000, Test Current=20mA, Case/Package=0603, Category=LEDs, ComponentLink1Description=https://datasheet.ciiva.com/29562/150060gs75000-29562868.pdf?src-supplier=Digi-Key, ComponentLink1URL=https://datasheet.ciiva.com/29562/150060gs75000-29562868.pdf?src-supplier=Digi-Key, ComponentLink2Description=https://datasheet.ciiva.com/29279/759427-da-01-en-chipled-0603-w-kl-gruen-150060gs75000-29279201.pdf?src-supplier=Conrad, ComponentLink2URL=https://datasheet.ciiva.com/29279/759427-da-01-en-chipled-0603-w-kl-gruen-150060gs75000-29279201.pdf?src-supplier=Conrad, ComponentLink3Description=https://datasheet.ciiva.com/29562/150060gs75000-29562869.pdf?src-supplier=Digi-Key, ComponentLink3URL=https://datasheet.ciiva.com/29562/150060gs75000-29562869.pdf?src-supplier=Digi-Key, ComponentLink4Description=https://datasheet.ciiva.com/29562/150060gs75000-29562870.pdf?src-supplier=Digi-Key, ComponentLink4URL=https://datasheet.ciiva.com/29562/150060gs75000-29562870.pdf?src-supplier=Digi-Key, Dominant Wavelength=520nm, Height=0.7mm, Lead Free="Lead Free", Length=1.6mm, Lens Style=Clear,Rectangular, Luminous Intensity=430mcd, Mount="Surface Mount", Packaging="Tape and Reel", Pricing 1="1=0.14000, 50=0.13300, 100=0.11400, 500=0.09900 (USD)", REACH SVHC=Unknown, RoHS=Yes, Stock 1=71509, Supplier 1=Digi-Key, Viewing Angle=140°, Wavelength=520nm, Width=0.8mm
LED25: library part 150060BS75000, "Wurth Elektronik 0603 blue", Case Code (Imperial)=0603, Case Code (Metric)=1608, Color=Green, Forward Current=30mA, Forward Voltage=3.2V, Manufacturer="Wurth Electronics", Manufacturer Part Number=150060GS75000, Max Operating Temperature=85°C, Min Operating Temperature=-40°C, Package Quantity=4000, Test Current=20mA, Case/Package=0603, Category=LEDs, ComponentLink1Description=https://datasheet.ciiva.com/29562/150060gs75000-29562868.pdf?src-supplier=Digi-Key, ComponentLink1URL=https://datasheet.ciiva.com/29562/150060gs75000-29562868.pdf?src-supplier=Digi-Key, ComponentLink2Description=https://datasheet.ciiva.com/29279/759427-da-01-en-chipled-0603-w-kl-gruen-150060gs75000-29279201.pdf?src-supplier=Conrad, ComponentLink2URL=https://datasheet.ciiva.com/29279/759427-da-01-en-chipled-0603-w-kl-gruen-150060gs75000-29279201.pdf?src-supplier=Conrad, ComponentLink3Description=https://datasheet.ciiva.com/29562/150060gs75000-29562869.pdf?src-supplier=Digi-Key, ComponentLink3URL=https://datasheet.ciiva.com/29562/150060gs75000-29562869.pdf?src-supplier=Digi-Key, ComponentLink4Description=https://datasheet.ciiva.com/29562/150060gs75000-29562870.pdf?src-supplier=Digi-Key, ComponentLink4URL=https://datasheet.ciiva.com/29562/150060gs75000-29562870.pdf?src-supplier=Digi-Key, Dominant Wavelength=520nm, Height=0.7mm, Lead Free="Lead Free", Length=1.6mm, Lens Style=Clear,Rectangular, Luminous Intensity=430mcd, Mount="Surface Mount", Packaging="Tape and Reel", Pricing 1="1=0.14000, 50=0.13300, 100=0.11400, 500=0.09900 (USD)", REACH SVHC=Unknown, RoHS=Yes, Stock 1=71509, Supplier 1=Digi-Key, Viewing Angle=140°, Wavelength=520nm, Width=0.8mm
R1 R2 R9 R10: library part RT0603BRC07910RL, "YAGEO 0603 910 ohm", Manufacturer_Name=KEMET, Manufacturer_Part_Number=RC0603JR-070RL, Mouser Part Number=603-RC0603JR-070RL, Datasheet Link=https://datasheet.datasheetarchive.com/originals/distributors/Datasheets_SAMA/902f9e387b938f871d31120f5fc1d65e.pdf, Geometry.Height=0.55mm, Mouser Price/Stock=https://www.mouser.co.uk/ProductDetail/YAGEO/RC0603JR-070RL?qs=2cAdsCoAWRGWyPcuXgGiXQ%3D%3D
R3 R4 R5 R6 R7 R8 R11 R12 R13 R14 R15 R16 R17 R18 R19 R20 R21 R22 R23 R24 R25 R26 R27 R28 R29 R30 R31 R32 R33 R34 R35 R36 R37 R38 R39 R40 R41 R42 R43 R44 R45 R46 R47 R48 R66 R67 R68 R69 R70 R71 R72 R82 R83 R84 R85 R86 R87 R88 R89 R90 R91 R92 R93 R94 R95 R96 R97 R98 R99 R100 R101 R102 R103 R104 R105 R106 R107 R108 R109 R110 R111 R112 R113 R114 R115 R116 R117 R118 R119 R120 R121 R122 R123 R124 R125 R126 R127 R128 R129 R130 R131 R132 R133 R134 R135 R136 R137 R138 R139 R140 R141: library part RC0603JR-070RL, "YAGEO 0603 0 ohm", Manufacturer_Name=KEMET, Mouser Part Number=603-RC0603JR-070RL, Datasheet Link=https://datasheet.datasheetarchive.com/originals/distributors/Datasheets_SAMA/902f9e387b938f871d31120f5fc1d65e.pdf, Geometry.Height=0.55mm, Manufacturer_Part_Number=RC0603JR-070RL, Mouser Price/Stock=https://www.mouser.co.uk/ProductDetail/YAGEO/RC0603JR-070RL?qs=2cAdsCoAWRGWyPcuXgGiXQ%3D%3D
R49 R50 R51 R52 R53 R54 R55 R56 R58 R59 R60 R61 R62 R63 R64 R65 R73 R74 R75 R76 R77 R78 R79 R81: library part RC0603FR-13180RL, "YAGEO 0603 180 ohm", Manufacturer_Name=KEMET, Manufacturer_Part_Number=RC0603JR-070RL, Mouser Part Number=603-RC0603JR-070RL, Datasheet Link=https://datasheet.datasheetarchive.com/originals/distributors/Datasheets_SAMA/902f9e387b938f871d31120f5fc1d65e.pdf, Geometry.Height=0.55mm, Mouser Price/Stock=https://www.mouser.co.uk/ProductDetail/YAGEO/RC0603JR-070RL?qs=2cAdsCoAWRGWyPcuXgGiXQ%3D%3D
R57: library part RC0603FR-0747KL, "YAGEO 0603 47", Manufacturer_Name=KEMET, Manufacturer_Part_Number=RC0603JR-070RL, Mouser Part Number=603-RC0603JR-070RL, Datasheet Link=https://datasheet.datasheetarchive.com/originals/distributors/Datasheets_SAMA/902f9e387b938f871d31120f5fc1d65e.pdf, Geometry.Height=0.55mm, Mouser Price/Stock=https://www.mouser.co.uk/ProductDetail/YAGEO/RC0603JR-070RL?qs=2cAdsCoAWRGWyPcuXgGiXQ%3D%3D
R80: library part RC0603FR-10100RL, "YAGEO 0603 100 ohm", Manufacturer_Name=KEMET, Manufacturer_Part_Number=RC0603JR-070RL, Mouser Part Number=603-RC0603JR-070RL, Datasheet Link=https://datasheet.datasheetarchive.com/originals/distributors/Datasheets_SAMA/902f9e387b938f871d31120f5fc1d65e.pdf, Geometry.Height=0.55mm, Mouser Price/Stock=https://www.mouser.co.uk/ProductDetail/YAGEO/RC0603JR-070RL?qs=2cAdsCoAWRGWyPcuXgGiXQ%3D%3D
TP1 TP2 TP3 TP4 TP5 TP6 TP7 TP8 TP9 TP10 TP11 TP12 TP13 TP14 TP15: Color=Black, Manufacturer=Samtec, Manufacturer Part Number=TST-105-01-G-D, Max Operating Temperature=125°C, Min Operating Temperature=-55°C, Category="Headers and Wire Housings", ComponentLink1Description=https://datasheet.ciiva.com/739/tst-mkt-739845.pdf?src-supplier=Digi-Key, ComponentLink1URL=https://datasheet.ciiva.com/739/tst-mkt-739845.pdf?src-supplier=Digi-Key, ComponentLink2Description=https://datasheet.ciiva.com/10018/htst-10018510.pdf?src-supplier=Avnet, ComponentLink2URL=https://datasheet.ciiva.com/10018/htst-10018510.pdf?src-supplier=Avnet, Connector Type="Male Pin", Contact Material=Bronze, Contact Mating Length=0.25inch, Contact Plating=Gold, Depth=9.27mm, Gender=Male, Housing Color=Black, Housing Material=Polyester, Length=27.94mm, Mount="Through Hole", Number of Contacts=16, Number of Positions=16, Number of Rows=2, Orientation=Straight, Packaging=Rail/Tube, Pitch=2.54mm, Pricing 1="1=2.85000, 10=2.73600, 100=2.28000, 500=1.93800, 1000=1.65300, 5000=1.48200 (USD)", REACH SVHC="No SVHC", RoHS=Yes, Row Spacing=0.1inch, Stock 1=227, Supplier 1=Digi-Key, Termination=Solder
U1: "Octal Buffers/Drivers With 3-State Outputs", Manufacturer_Name="Texas Instruments", Mouser Part Number=595-SN74ABT240ADBR, Datasheet Link=http://www.ti.com/lit/gpn/sn74abt240a, Geometry.Height=2mm, Manufacturer_Part_Number=SN74ABT240ADBR, Mouser Price/Stock=https://www.mouser.co.uk/ProductDetail/Texas-Instruments/SN74ABT240ADBR?qs=JHHQeKcAU3Dt82k%252BVyiYdw%3D%3D
U2 U3: "Hex Inverters", Manufacturer_Name="Texas Instruments", Mouser Part Number=595-SN74AC04PWR, Datasheet Link=http://www.ti.com/lit/gpn/sn74ac04, Geometry.Height=1.2mm, Manufacturer_Part_Number=SN74AC04PWR, Mouser Price/Stock=https://www.mouser.co.uk/ProductDetail/Texas-Instruments/SN74AC04PWR?qs=RZS%252BpEsUn7pRvPNqsga4SA%3D%3D

## Free pads (board coordinates)
  round 200 hole 170: 37(200,200) 37(200,3800) 37(5400,200) 37(5400,3800)

## Via types
v1: diameter 50, hole 28, Top Layer to Bottom Layer, 152 vias

## Nets (pads, with @x,y where several pads share a name; then routed paths per layer and width w, separated by ;. In a path a pad name is that pad's centre, name@x,y a point inside that pad or via, vN(x,y) a via of type N, cw(c..) or ccw(c..) an arc to the next point about the centre after c; other vN are vias at no path point)
+3.3: H2.3 R57.1 TP9.1 | length 4971
  Top Layer w10: H2.3@200,1800 250,1750 390,1750 445,1805 507.75,1805 562.75,1750 TP9.1@900,1750 ; v1(4080,2950) v1(4080,3350)
  Bottom Layer w10: TP9.1@900,1750 1131.36,1981.36 3111.36,1981.36 v1(4080,2950) ; v1(4080,3350) 4087.35,3350 4105.86,3368.5 R57.1@4200,3368.5
+5: B1.2 B6.2 B7.1 B8.1 B9.1 B10.1 C1.2 C3.2 C5.2 C7.2 C9.2 C10.2 C11.2 C12.2 C13.1 C14.1 C15.1 C16.1 C17.1 C18.1 H2.1 H3.2 IC1.10 IC1.18 IC1.28 R1.1 R2.1 R9.1 R10.1 R49.2 R50.2 R51.2 R52.2 R53.2 R54.2 R55.2 R56.2 R58.2 R59.2 R60.2 R61.2 R62.2 R63.2 R64.2 R65.2 R73.2 R74.2 R75.2 R76.2 R77.2 R78.2 R79.2 R80.1 R81.2 U1.20 U2.14 U3.14 | length 7400.2
  Top Layer w10: v1(910,645) 942.2,612.8 B6.2@993.39,612.8 ; v1(915,945) 915,938.65 940.86,912.8 B1.2@993.39,912.8 ; U1.20@1289.76,2615.16 1293.62,2619.02 1349.21,2619.02 v1(1355.2,2625) ; v1(2031,1357) 2059.58,1357 2114.58,1412 IC1.10@2114.58,1473.15 2114.58,1504 2171.84,1561.26 IC1.18@2360.17,1561.26 ; IC1.28@2209.06,1806.85 2215.88,1800.04 2215.88,1735.86 2221.73,1730 v1(2270,1730) ; v1(2300,599) 2300,519.37 2319.35,500.02 2352.74,500.02 B9.1@2353.39,499.37 ; B8.1@2353.39,799.37 2344.25,799.37 2343.34,800.28 2343.34,817.7 2406.04,880.39 2428.39,880.39 v1(2435.5,887.5) ; U2.14@2585.67,2666.77 2625,2666.77 2658.23,2700 v1(2700,2700) ; R1.1@2940,1201.5 2940,1250 2975,1285 v1(3035,1285) ; R9.1@3300,1201.5 3300,1224 3376,1300 v1(3392,1300) ; B7.1@3453.39,799.37 3518,863.98 v1@3518,887.14 ; v1(3517.14,887.14) v1@3518,887.14 ; v1@3518,891 v1@3518,887.14 ; R2.1@3660,1201.5 3660,1219.43 3740.57,1300 v1(3753,1300) ; R10.1@4060,1201.5 4060,1207 4150,1297 v1(4150,1300) v1@4148.28,1300 ; v1(5105,3650) 5140.67,3614.33 U3.14@5140.67,3551.77 ; B10.1@3453.39,499.37 3467,499.37 3480,512.37 v1(3480,572) 3453.39,545.39 B10.1@3453.39,499.37
  Bottom Layer w10: v1(630,3340) 633.5,3343.5 R65.2@750,3343.5 R64.2@850,3343.5 R63.2@950,3343.5 R62.2@1050,3343.5 R61.2@1150,3343.5 R60.2@1250,3343.5 R59.2@1350,3343.5 R58.2@1450,3343.5 ; v1(1550,3330) 1588.5,3368.5 R80.1@1790,3368.5 R79.2@1940,3368.5 R52.2@2085,3368.5 R53.2@2215,3368.5 R51.2@2380,3368.5 R49.2@2565,3368.5 R50.2@2725,3368.5 R55.2@2900,3368.5 R54.2@3065,3368.5 R74.2@3235,3368.5 R73.2@3390,3368.5 R78.2@3550,3368.5 R77.2@3691,3368.5 R76.2@3835,3368.5 R75.2@3975,3368.5 ; v1(2031,1357) 2110,1436 C17.1@2110,1468.5 C18.1@2170,1468.5 C13.1@2230,1468.5 2278.5,1468.5 C14.1@2290,1480 ; C16.1@2171.5,1642.99 2170,1641.5 C16.1@2170,1647.5 2170,1682 2208,1720 2243.7,1720 2244.14,1720 2246.49,1722.35 2262.35,1722.35 v1(2270,1730) ; C16.1@2174.5,1642.99 2179.01,1647.5 C15.1@2230,1647.5 ; v1(2300,599) 2307.65,591.35 2307.65,507.35 2323.5,491.5 C11.2@2445,491.5 ; v1(2435.5,887.5) 2440,883 C9.2@2440,791.5 ; C1.2@3033,1169.5 3035,1171.5 v1(3035,1285) ; C5.2@3365,1171.5 3365,1273 v1(3392,1300) ; v1(3480,572) 3533,572 3540,565 C12.2@3540,491.5 ; v1(3517.14,887.14) 3518,887.14 3540,865.14 C10.2@3540,796.5 ; C3.2@3730,1171.5 3730,1274.72 3753,1297.72 v1(3753,1300) ; C7.2@4125,1171.5 4125,1276.72 v1@4148.28,1300 ; v1(4290,3240) 4290,3340 4318.5,3368.5 R56.2@4390,3368.5
ADC_CS_0: R3.1 R71.1 R124.2 | length 3684.7
  Top Layer w10: R3.1@768.5,940 768.5,1131.5 v1(1140,1503) ; R71.1@3065,2708.5 2993.31,2708.5 2942,2657.19 2942,1992 v1(2698,1748) ; v1(2698,1748) R124.2@2621.5,1750 2696,1750 v1(2698,1748)
  Bottom Layer w10: v1(1140,1503) 2453,1503 v1(2698,1748)
ADC_CS_1: R11.1 R72.1 R122.2 | length 4117.3
  Top Layer w10: R11.1@768.5,640 750,640 742,648 742,885.3 768,911.3 795,911.3 795,1024 1270,1499 v1(1270,1911) ; R122.2@2621.5,1810 2621.5,1864 ; v1(2642,1946.36) 2642,1884.5 2621.5,1864 ; R72.1@2900,2708.5 2900,2458 2848,2406 2682,2406 2621.5,2345.5 2621.5,1946.36 2621.5,1864
  Bottom Layer w10: v1(1270,1911) 1531,1911 1568,1948 2640.36,1948 v1(2642,1946.36)
ADC_Din: R4.1 R12.1 R66.1 R126.2 | length 4592.6
  Top Layer w10: R12.1@1371.5,560 1371.5,562.95 1360.75,573.7 1349.66,573.7 1343.8,579.56 1343.8,745 ; R4.1@1371.5,860 1371.5,857.05 1360.75,846.3 1349.66,846.3 1343.8,840.44 1343.8,745 ; v1(2321,2464) 2251,2464 2231,2484 2231,2708 2219,2720 R66.1@2198.5,2720 2023.66,2720 1481,2177.34 1481,1409 1120,1048 1120,777 1152,745 1343.8,745 ; R126.2@2621.5,1690 2595,1690 2595,1780 2648,1780 2692,1824 v1(2692,2336)
  Bottom Layer w10: v1(2321,2464) 2449,2336 v1(2692,2336)
ADC_DOut: R6.1 R14.1 R67.1 R128.2 | length 4944
  Top Layer w10: R14.1@1371.5,620 1393,620 ; R6.1@1371.5,920 1345.86,920 1340,925.86 1340,1034.14 1345.86,1040 1515,1040 1530,1025 1530,757 1393,620 ; v1(1666.76,1887.76) 1505,1887.76 ; R67.1@2198.5,2615 2069,2615 1505,2051 1505,1887.76 ; R128.2@2621.5,1630 2677,1630 v1(2819,1772) ; 1393,620 1474,620 1565,711 1565,1080 1505,1140 1505,1887.76
  Bottom Layer w10: v1(1666.76,1887.76) 2703.24,1887.76 v1(2819,1772)
ADC_SCLK: R8.1 R16.1 R68.1 R130.2 | length 4557.7
  Top Layer w10: R16.1@1371.5,680 1382.02,690.52 1382.02,732.02 1420,770 v1(1465,770) 1475.82,770 1486.61,780.78 1490.78,780.78 1505,795 1505,981.79 1499.14,987.64 1379.14,987.64 R8.1@1371.5,980 ; v1(2128,2255) 2128,2464 2174,2510 R68.1@2198.5,2510 ; R130.2@2621.5,1570 2703,1570 ; v1(2727,1594) 2703,1570 ; v1(3010,2432) 3010,1812 2768,1570 2703,1570
  Bottom Layer w10: v1(1465,770) 1903,770 v1(2727,1594) ; v1(2128,2255) 2160,2223 2801,2223 v1(3010,2432)
Channel_1: R17.1 R27.2 | length 4299.4
  Top Layer w10: R27.2@2148.5,800 2148.5,960 2180.5,992 2553.49,992 3506.49,1945 4032,1945 4069.53,1982.53 4069.53,2116.53 4088,2135 4640,2135 4659,2154 4659,2804 4795,2940 R17.1@5008.5,2940
Channel_1_Ref: B2.1 C2.2 R1.2 R5.2 R21.1 | length 2879.9
  Top Layer w10: R5.2@1371.5,800 1400,800 v1(1455,855) ; R21.1@2751.5,680 2733,680 2725,688 2725,795 2725.75,795.75 2725.75,900.75 2855,1030 v1(2890,1030) 2890,1035.86 2940,1085.86 R1.2@2940,1138.5 2998,1138.5 2999.1,1137.4 B2.1@3058.66,1137.4
  Bottom Layer w10: v1(1455,855) 1407.83,807.83 1407.83,732.9 1424,716.73 1684.19,716.73 1692.48,725.03 2091.14,725.03 2403.61,1037.5 2886.68,1037.5 2900.78,1051.61 2900.78,1055.78 2985,1140 3098.12,1140 3103.98,1145.86 3103.98,1159.75 3114.72,1170.5 C2.2@3115,1170.5 ; v1@2882.5,1037.5 v1(2890,1030)
Channel_2: R18.1 R30.2 | length 4214.5
  Top Layer w10: R30.2@2148.5,720 2148.5,744.5 2175,771 2175,941 2208,974 2594.01,974 3340.01,1720 3540,1720 3645,1825 3890,1825 3930,1865 4180,1865 4205,1890 4205,2106.14 4210.86,2112 4658,2112 4690,2144 4690,2526.08 4966.92,2803 4992,2803 5008.5,2819.5 R18.1@5008.5,2840
Channel_2_Ref: B4.1 C6.2 R7.2 R9.2 R37.1 | length 4063.1
  Top Layer w10: R7.2@831.5,860 897.79,860 946.93,810.86 975.36,810.86 1120,666.21 1120,247 1190,177 2672.5,177 2751.5,256 R37.1@2751.5,380 2875,380 3038,543 3038,835 3300,1097 R9.2@3300,1138.5 3417.56,1138.5 B4.1@3418.66,1137.4 3496,1137.4 3517,1158.4 3517,1213 v1(3490,1240)
  Bottom Layer w10: C6.2@3460,1171.5 3470,1181.5 3470,1214.14 3490,1234.14 v1(3490,1240)
Channel_3: R19.1 R39.2 | length 4686.8
  Top Layer w10: v1(2033.21,795.21) 2033.21,723.79 2148.5,608.5 R39.2@2148.5,500 ; v1(4870,1700) 5040,1870 5040,2664 5008.5,2695.5 R19.1@5008.5,2740
  Bottom Layer w10: v1(2033.21,795.21) 2870,1632 4817,1632 4859.22,1674.22 4859.22,1678.39 4870,1689.18 v1(4870,1700)
Channel_3_Ref: B3.1 C4.2 R2.2 R13.2 R22.1 | length 3735.4
  Top Layer w10: R13.2@1371.5,500 1501,500 v1(1599,598) ; v1(3630,1050) 3630,1121.9 3635.86,1127.76 3649.25,1127.76 R2.2@3660,1138.5 3718,1138.5 3719.1,1137.4 B3.1@3778.66,1137.4 3803.6,1137.4 3821,1120 3821,989 3845,965 3845,770 3897.25,770 3897.25,711.3 3880,711.3 3871.5,702.79 R22.1@3871.5,680
  Bottom Layer w10: v1(1599,598) 1697,598 1715,580 2199.14,580 2205,585.86 2205,625 2235,655 2359.14,655 2434.14,580 2515,580 2553,618 2553,620 2707.21,774.21 2922.21,774.21 3293,1145 3626,1145 ; v1(3630,1050) 3626,1054 3626,1145 ; C4.2@3815,1171.5 3815,1145 3626,1145
Channel_4: R20.1 R41.2 | length 4248
  Top Layer w10: R41.2@2148.5,420 2148.5,444.5 2180,476 2180,666 2192,678 2368,678 2400,710 2400,749 3346,1695 3545,1695 3650,1800 3910,1800 3950,1760 4585,1760 4885,2060 4885,2549.63 4975.37,2640 R20.1@5008.5,2640
Channel_4_Ref: B5.1 C8.2 R10.2 R15.2 R38.1 | length 5444.4
  Top Layer w10: v1(685,546) 699,560 R15.2@768.5,560 ; R38.1@3871.5,380 3952,380 4060,488 v1(4060,805) R10.2@4060,1138.5 4177.56,1138.5 B5.1@4178.66,1137.4
  Bottom Layer w10: v1(685,546) 695.82,546 706.82,535 1996.8,535 2071.8,460 2520,460 2531,471 2531,564 2726.21,759.21 3380.71,759.21 3381.5,760 4036,760 4244,968 4244,989 ; v1(4060,805) 4244,989 ; C8.2@4215,1171.5 4244,1171.5 4244,989
Channel_5: R23.1 R28.2 | length 3096.2
  Top Layer w10: R28.2@3248.5,800 3248.5,824 3257.01,832.5 3357.5,832.5 3563,1038 3563,1166 3580,1183 3580,1295.18 3567,1308.18 v1(3567,1319) ; v1(4475,1345) 4475,1348 4600,1473 4600,1742.64 4900,2042.64 4900,2480 4960,2540 R23.1@5008.5,2540
  Bottom Layer w10: v1(3567,1319) 3674,1319 3715,1360 4449.18,1360 4464.18,1345 v1(4475,1345)
Channel_6: R24.1 R32.2 | length 3227.9
  Top Layer w10: R32.2@3248.5,720 3244.31,724.19 3244.31,755.6 3222.76,777.16 3222.76,822.84 3247.42,847.5 3344.5,847.5 3548,1051 3548,1262 v1(3470,1340) ; v1(4695,1550) 4689.89,1555.11 4689.89,1802.95 4915,2028.05 4915,2324 5008.5,2417.5 R24.1@5008.5,2440
  Bottom Layer w10: v1(3470,1340) 3725,1595 4650,1595 v1(4695,1550)
Channel_7: R25.1 R42.2 | length 3484.1
  Top Layer w10: R42.2@3248.5,520 3248.5,544 3295.5,591 3411,591 3578,758 3578,1142 3620,1184 3620,1361.72 3625.86,1367.57 3626.75,1367.57 3639.18,1380 v1(3650,1380) ; v1(4755,1800) 4758,1800 4930,1972 4930,2295 4975,2340 R25.1@5008.5,2340
  Bottom Layer w10: v1(3650,1380) 4695,1380 4920,1605 4920,1775 4885,1810 4780.86,1810 4778.51,1807.65 4762.65,1807.65 v1(4755,1800)
Channel_8: R26.1 R45.2 | length 3578.1
  Top Layer w10: R45.2@3248.5,440 3254,440 3364,330 4657,330 4791,464 4791,1561.89 4725,1627.89 4725,1702 4945,1922 4945,2200 4983.61,2238.61 5007.12,2238.61 R26.1@5008.5,2240
CPU_CS: R94.1 R110.2 R139.2 | length 3195.2
  Top Layer w10: R110.2@931.5,1450 931.5,1452.95 942.24,1463.7 973.82,1463.7 v1(976.12,1466) ; v1(1055,1992) 1062.65,1999.65 1062.65,2031.44 1413.95,2382.74 1413.95,2408.95 1510,2505 1510,2568.5 1636.3,2694.8 1636.3,2697.76 1647.05,2708.5 R94.1@1650,2708.5 ; v1(2034,1067) 2208,1067 2240,1099 R139.2@2240,1178.5
  Bottom Layer w10: v1(976.12,1466) v1@976.12,1467.88 ; v1(1055,1992) 860,1797 860,1584 v1@976.12,1467.88 ; v1(2034,1067) 1811,1290 1154,1290 v1@976.12,1467.88
CPU_D0: R99.1 R115.1 U1.2 | length 2855.8
  Top Layer w10: R99.1@631.5,1900 631.5,2496.5 770,2635 1055.67,2635 1055.67,2589.57 U1.2@1010.24,2589.57 895.86,2589.57 876.29,2570 v1(870,2570) ; v1(1861,2226) 2022,2226 2150,2098 R115.1@2150,2051.5
  Bottom Layer w10: v1(870,2570) 875.86,2570 895.86,2590 1497,2590 v1(1861,2226)
CPU_D1: R101.1 R117.1 U1.4 | length 2352.2
  Top Layer w10: R101.1@631.5,1800 632.84,1801.35 632.84,1844.84 796.5,2008.5 v1@813.5,2008.5 ; v1(805,2017) v1@813.5,2008.5 ; U1.4@1010.24,2538.39 903.39,2538.39 822,2457 822,2062 812.65,2052.65 812.65,2009.35 v1@813.5,2008.5 ; v1(1831,2017) 1906,2092 2090,2082 R117.1@2090,2051.5
  Bottom Layer w10: v1(805,2017) 814.93,2017 838.25,2040.32 845.32,2040.32 850,2045 1110,2045 1140,2015 1781.21,2015 1783.21,2017 v1(1831,2017)
CPU_D2: R104.1 R119.1 U1.6 | length 3110.7
  Top Layer w10: v1(490,1755) 490,1753.28 513.28,1730 614.89,1730 620.75,1724.14 620.75,1710.75 R104.1@631.5,1700 889.53,1700 900,1710.47 940.14,1710.47 946,1716.33 946,1883 840,1989 840,2410 917.2,2487.2 U1.6@1010.24,2487.2 ; v1(1949.5,2051.5) R119.1@2030,2051.5
  Bottom Layer w10: v1(490,1755) 490,1765 785,2060 1805,2060 1806,2061 1940,2061 v1(1949.5,2051.5)
CPU_D3: R107.1 R121.1 U1.8 | length 3146.9
  Top Layer w10: v1(470,1550) 471.1,1551.1 521.1,1551.1 535,1565 625.64,1565 631.5,1570.86 R107.1@631.5,1600 ; v1(905,2390) 905,2395 946.02,2436.02 U1.8@1010.24,2436.02 ; v1(1730,2115) 1737.65,2107.35 1737.65,2086.52 1740,2084.18 1740,1863.5 R121.1@1743.5,1860
  Bottom Layer w10: v1(470,1550) 445,1575 445,1932 638,2125 1426,2125 1430,2125 ; v1(905,2390) 912.65,2397.65 928.51,2397.65 930.86,2400 1420.14,2400 1426,2394.14 1426,2129 1430,2125 ; v1(1730,2115) 1722.35,2122.65 1706.49,2122.65 1704.14,2125 1430,2125
CPU_D4: R109.1 R123.1 U1.11 | length 2774.2
  Top Layer w10: R109.1@631.5,1500 875.79,1500 900,1524.21 900,1583 913,1596 ; v1(1004,1596) 913,1596 ; U1.11@1289.76,2384.84 1135,2384.84 915,2164.84 915,1965 965,1915 965,1701.33 959.14,1695.47 911.47,1695.47 900,1684 900,1609 913,1596 ; v1(1671,1800) R123.1@1743.5,1800
  Bottom Layer w10: v1(1004,1596) 959.57,1596 924.93,1630.64 924.93,1638.93 999,1713 1172,1713 1302,1583 1654,1583 1671,1600 v1(1671,1800)
CPU_D5: R111.1 R125.1 U1.13 | length 3288.7
  Top Layer w10: R111.1@631.5,1400 v1(678,1400) ; v1(975,1980) 975,2040 1010,2075 1085,2075 1375,2365 1375,2430.17 1369.14,2436.02 U1.13@1289.76,2436.02 ; v1(1570,1170) 1570,1650.86 1659.14,1740 R125.1@1743.5,1740
  Bottom Layer w10: v1(975,1980) 964.18,1980 951.18,1993 865,1993 678,1806 v1(678,1400) 678,1348.15 856.15,1170 v1(1570,1170)
CPU_D6: R113.1 R127.1 U1.15 | length 4352.3
  Top Layer w10: v1(499,1244) 628.14,1244 634,1249.86 634,1297.5 R113.1@631.5,1300 v1(803,1300) ; U1.15@1289.76,2487.2 1392.8,2487.2 v1(1400,2480) ; v1(1637.93,1236.83) 1601,1273.76 1601,1660.64 1620.36,1680 R127.1@1743.5,1680
  Bottom Layer w10: v1(499,1244) 499,1299 447,1351 270,1351 250,1371 250,2178 562,2490 1374.14,2490 1376.49,2487.65 1392.35,2487.65 v1(1400,2480) ; v1(803,1300) 871,1232 1633.1,1232 v1(1637.93,1236.83)
CPU_D7: R114.1 R129.1 U1.17 | length 4424.3
  Top Layer w10: v1(631.5,1132) R114.1@631.5,1200 v1(704,1200) ; U1.17@1289.76,2538.39 1290.67,2539.29 1449.29,2539.29 v1(1455,2545) ; v1(1645,1105) 1672.93,1132.93 1672.93,1400.22 1664,1409.15 1664,1588 1696,1620 R129.1@1743.5,1620
  Bottom Layer w10: v1(631.5,1132) 658.5,1105 v1(1645,1105) ; v1(704,1200) 704,1298 631,1371 480,1371 430,1421 430,2285 575,2430 1435,2430 1485,2480 1485,2515 v1(1455,2545)
CPU_nInt: R92.1 R105.2 R141.2 | length 3126.2
  Top Layer w10: R105.2@931.5,1650 982,1650 ; v1(1051,1650) 982,1650 ; v1(1837,1378) 2003,1212 2112,1212 2120,1204 R141.2@2120,1178.5 ; R92.1@1940,2708.5 1940,2735 1767.9,2735 1428.95,2396.05 1428.95,2376.53 1120,2067.57 1120,1979.66 982,1841.66 982,1650
  Bottom Layer w10: v1(1051,1650) 1051,1448 1121,1378 v1(1837,1378)
CPU_Reset: R93.1 R112.2 R118.2 | length 2881.6
  Top Layer w10: R112.2@931.5,1350 931.5,1391 905,1417.5 905,1502.14 910.86,1508 1026,1508 1144,1626 1144,1863 1474.54,2193.54 1474.54,2412.54 1770.5,2708.5 R93.1@1790,2708.5 1790,2570 v1(1800,2560) ; R118.2@2330,2051.5 2330,2235 v1(2375,2280)
  Bottom Layer w10: v1(1800,2560) 2085,2560 v1@2355,2290